# EAGLE board SparkFun_Thing_Plus_RA6M5-Panel (EAGLE 9.6.2), part 1 of 6
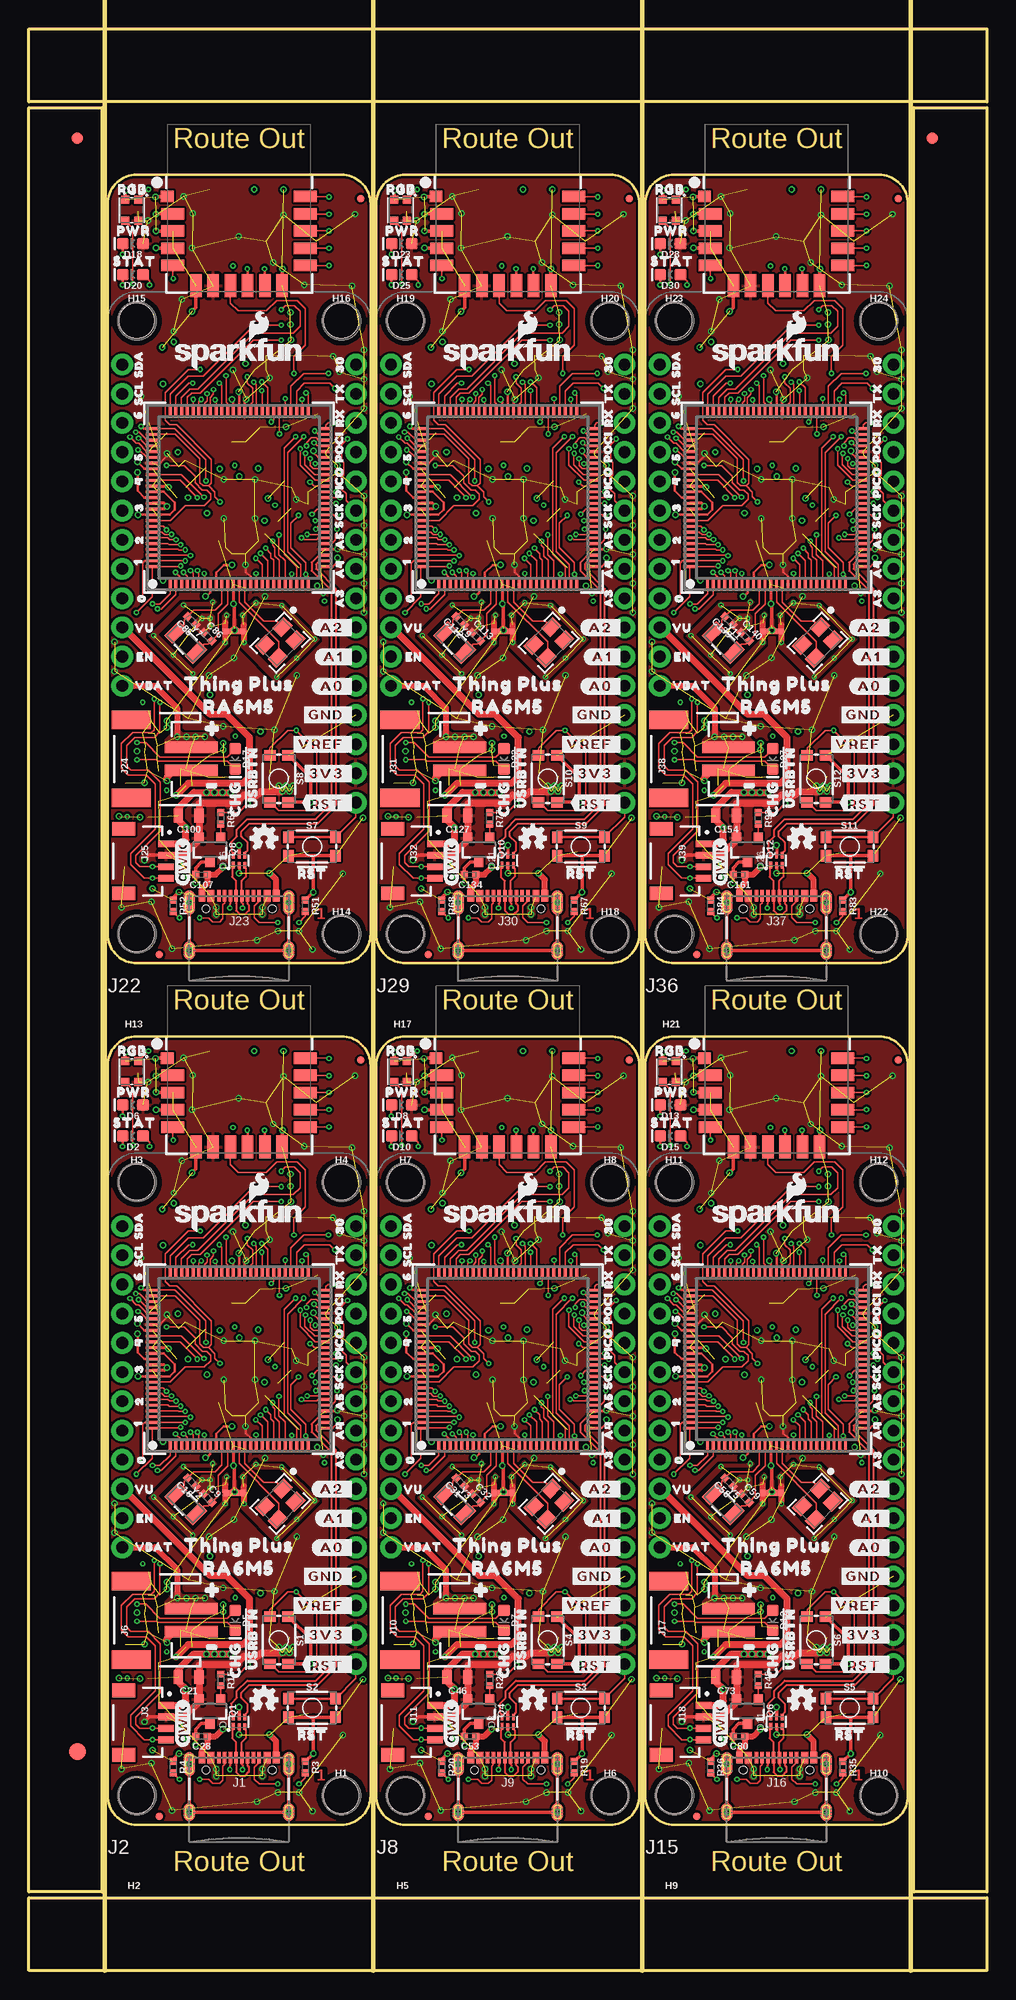
[diagram p0: board, top side]
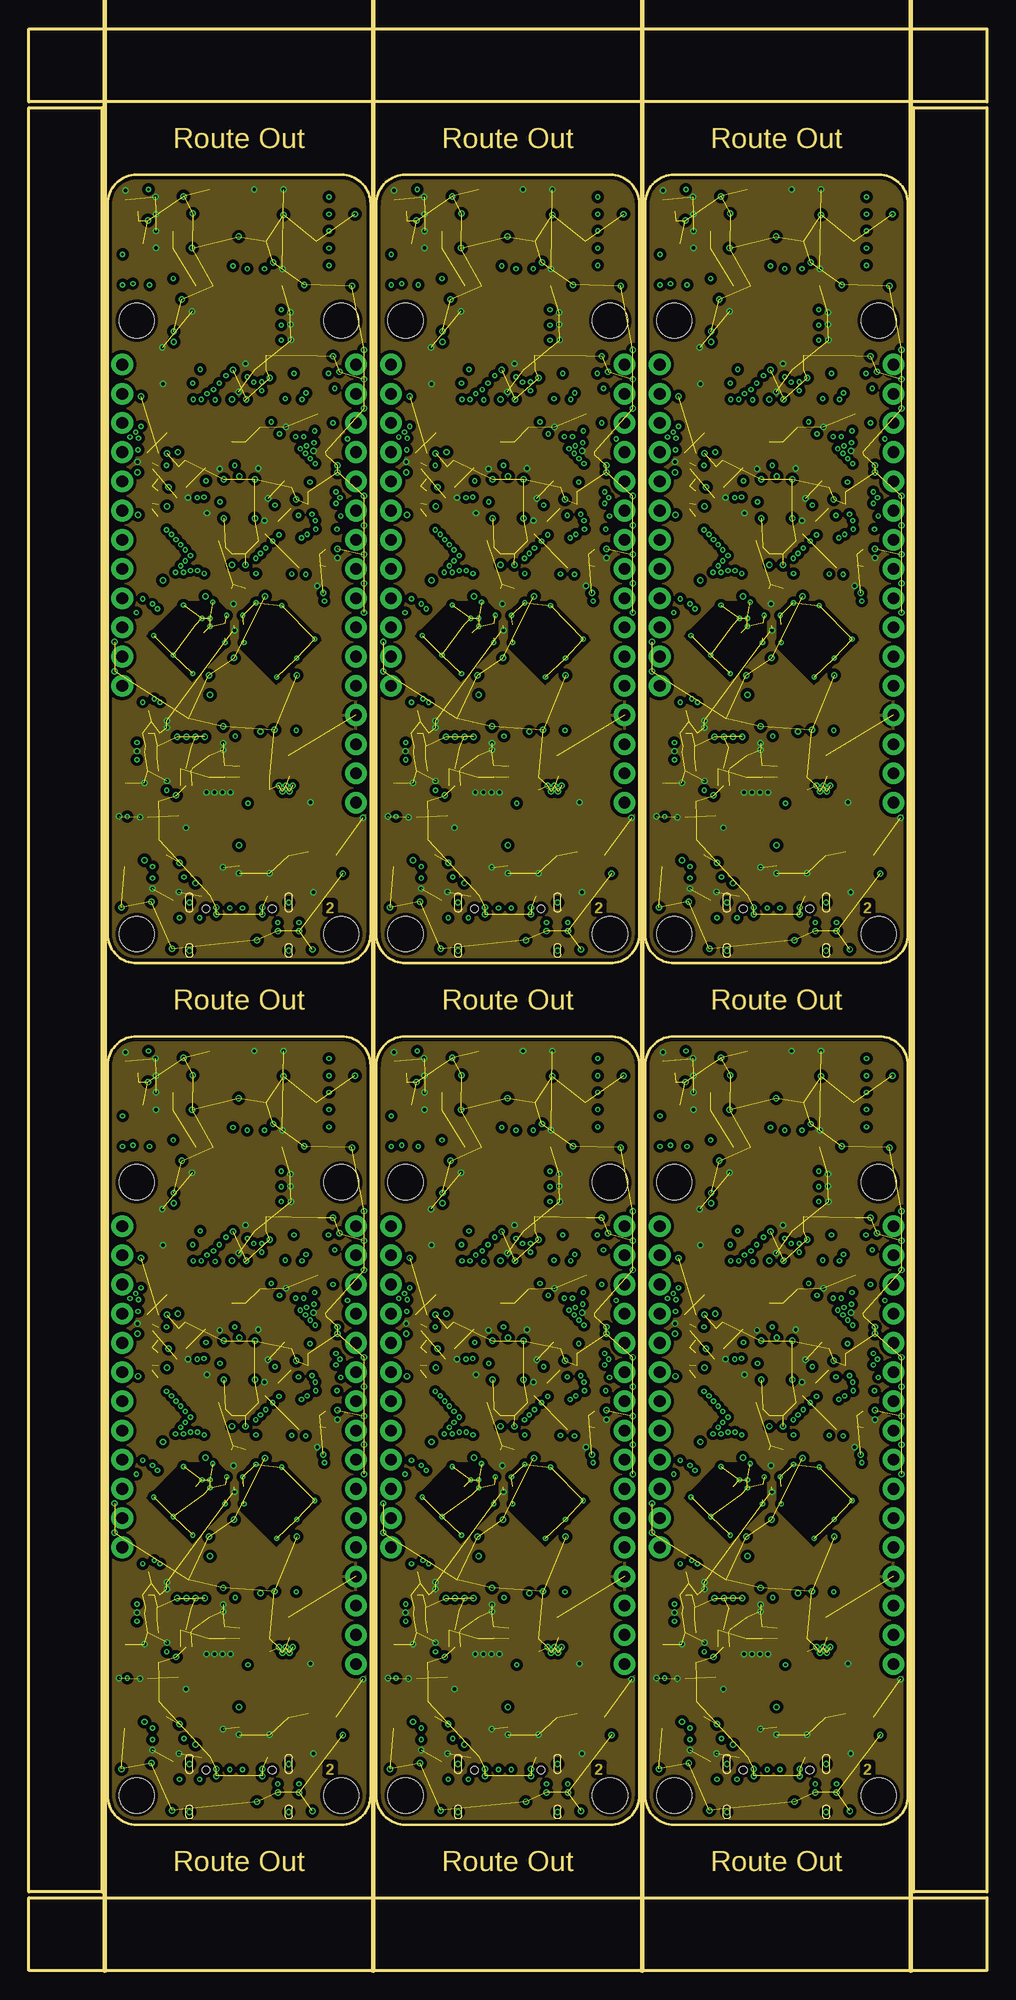
[diagram p1: board, inner layer Route2]
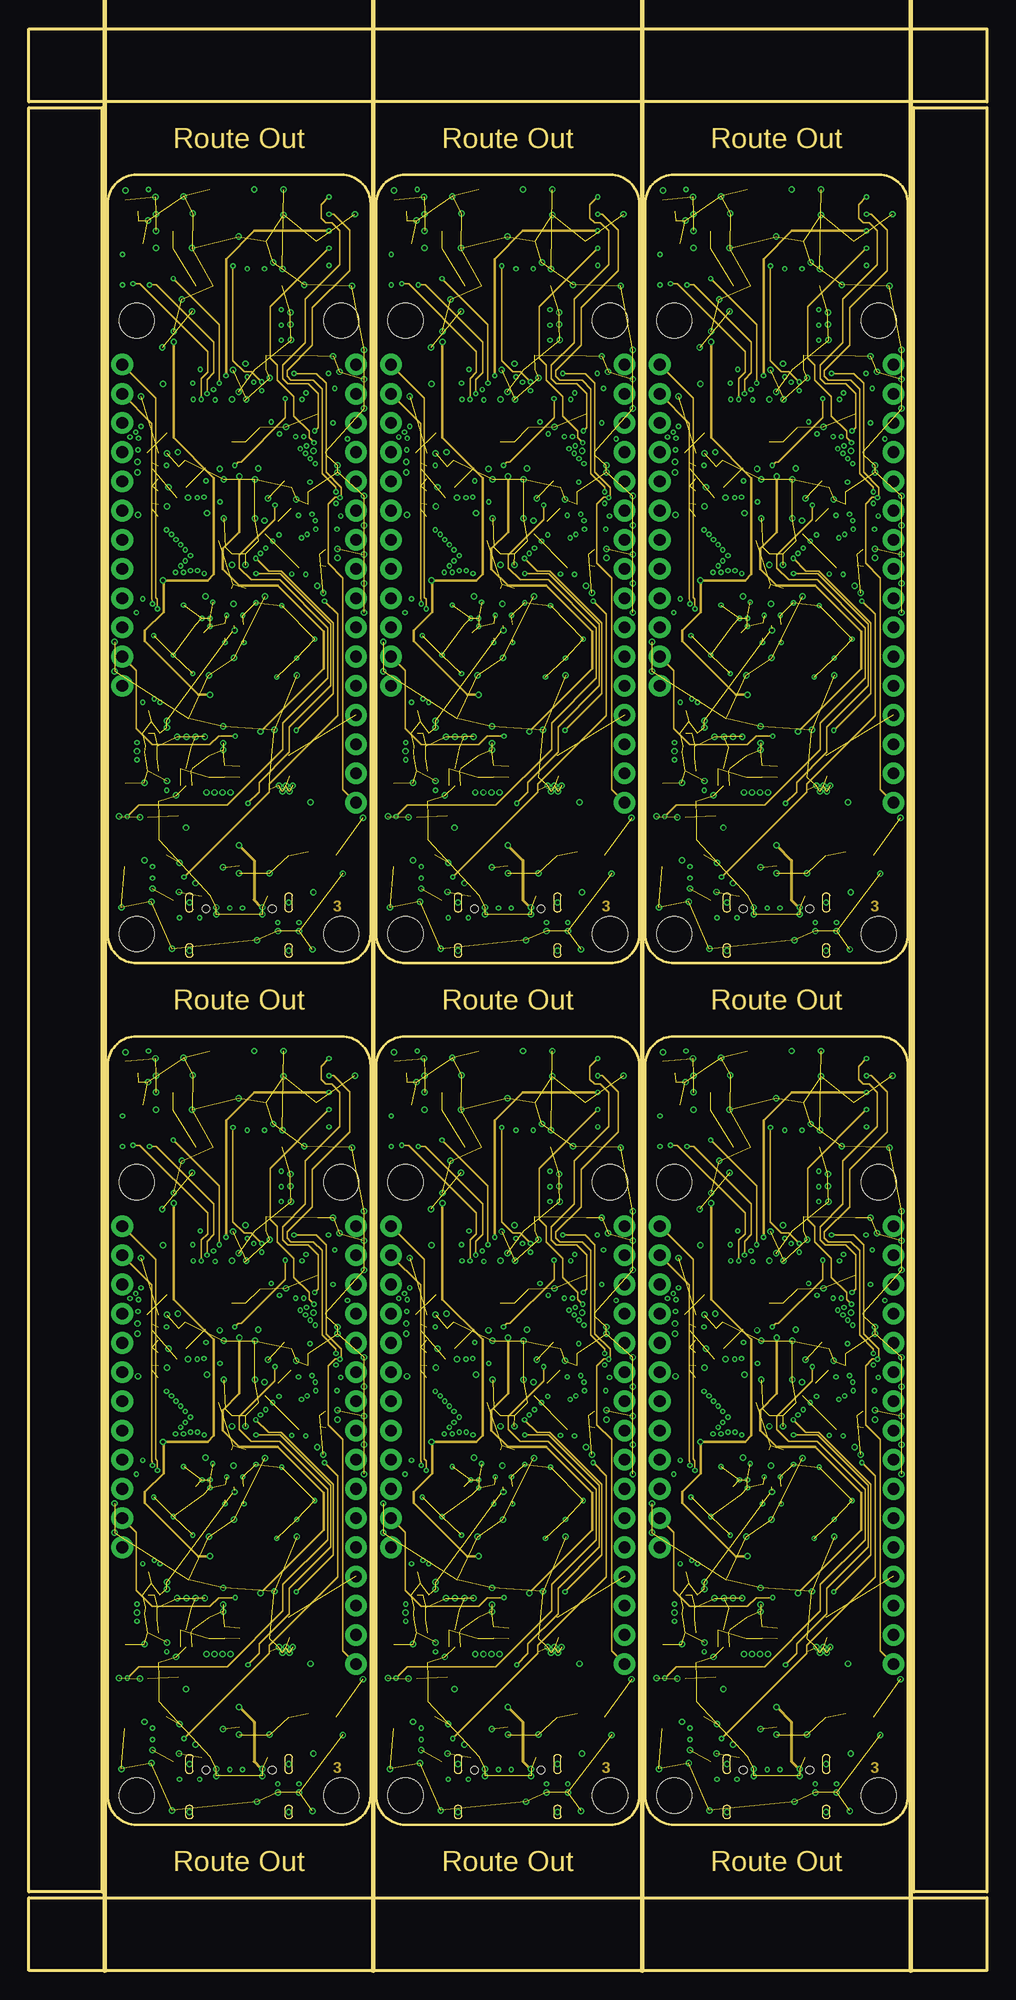
[diagram p2: board, inner layer Route3]
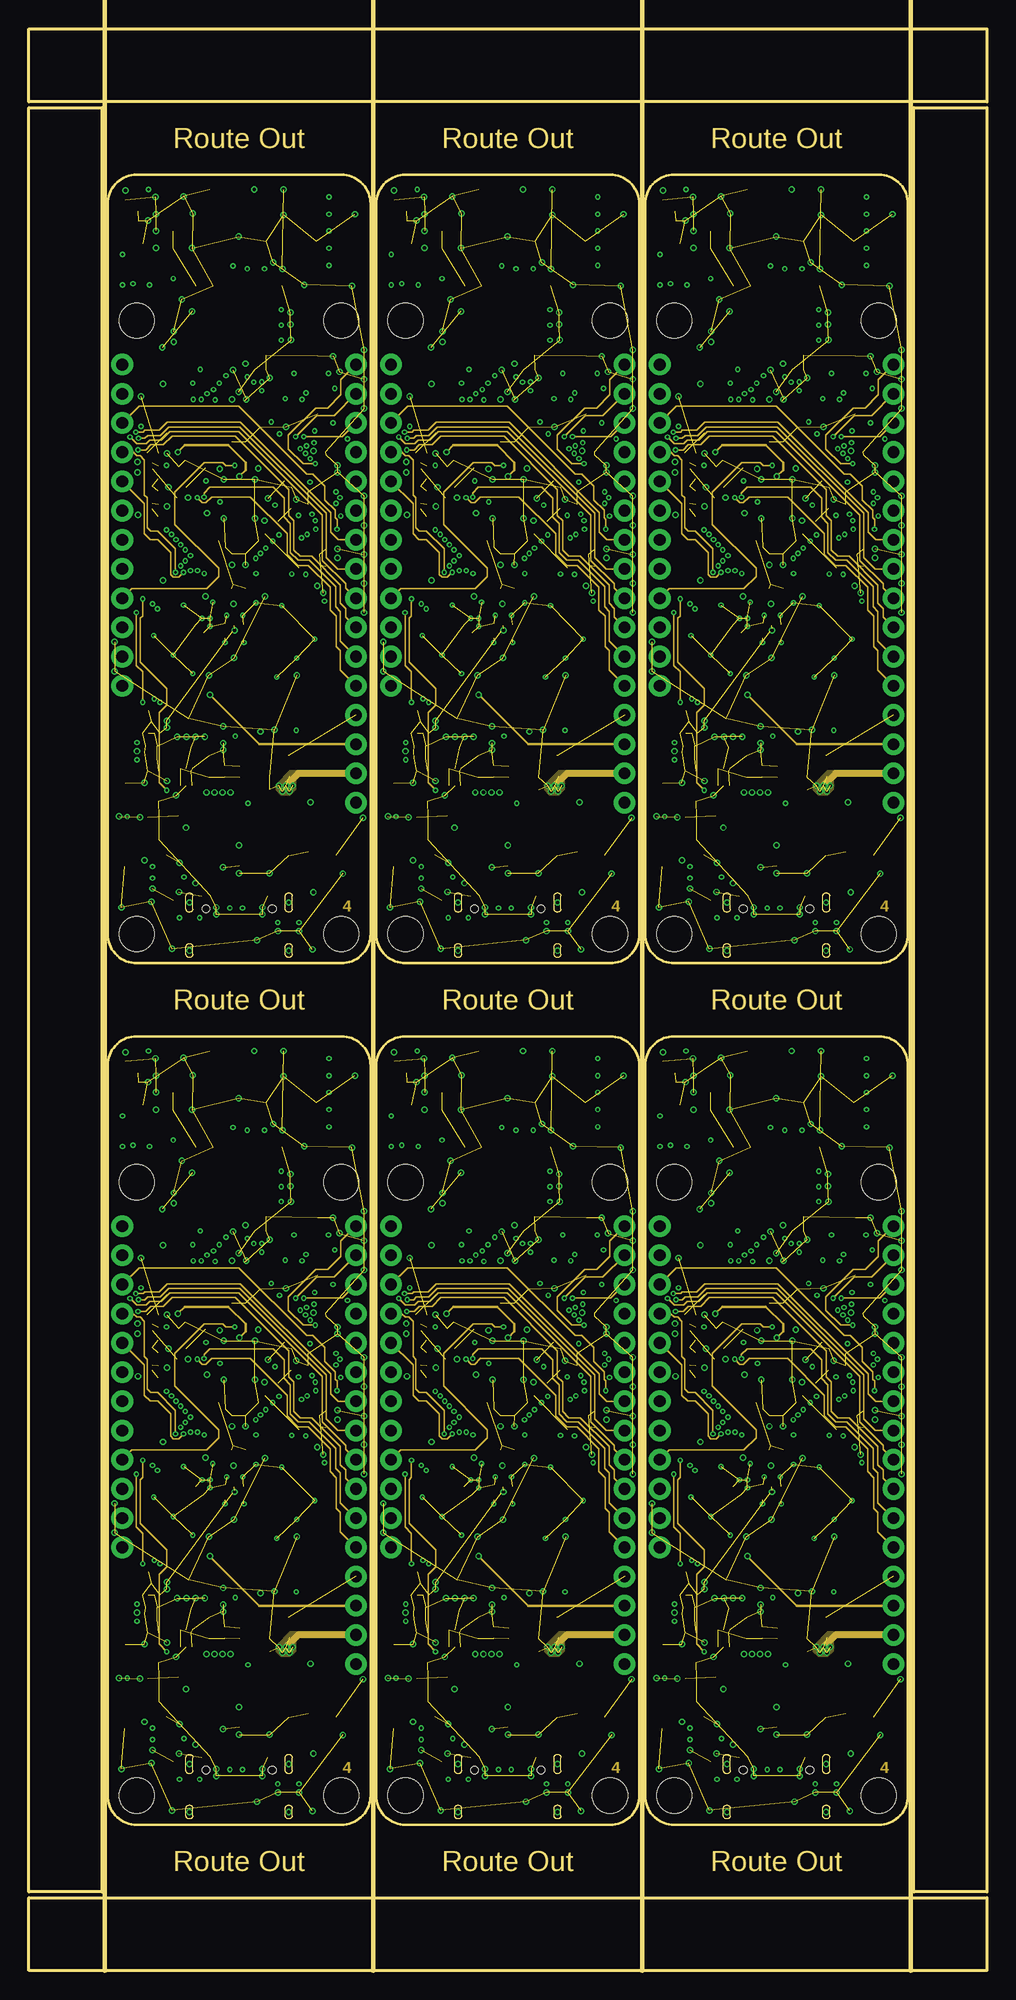
[diagram p3: board, inner layer Route14]
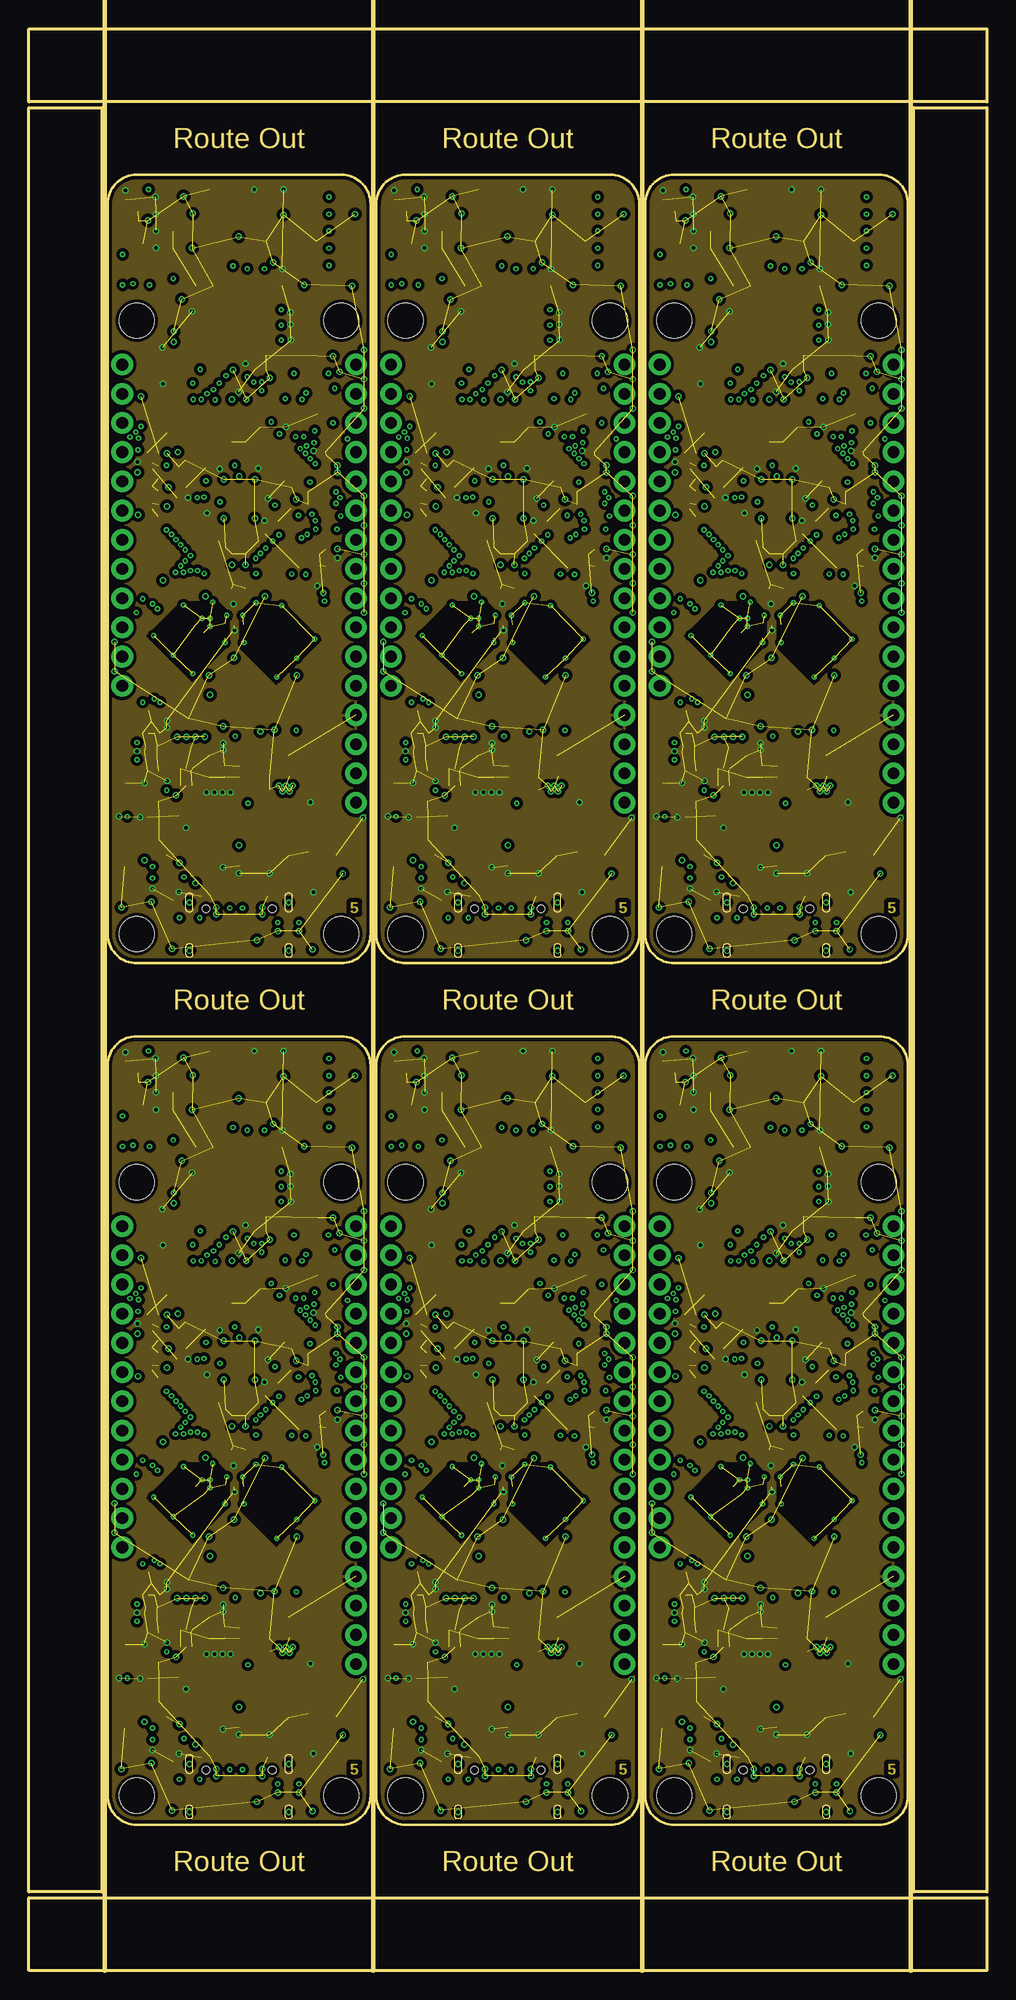
[diagram p4: board, inner layer Route15]
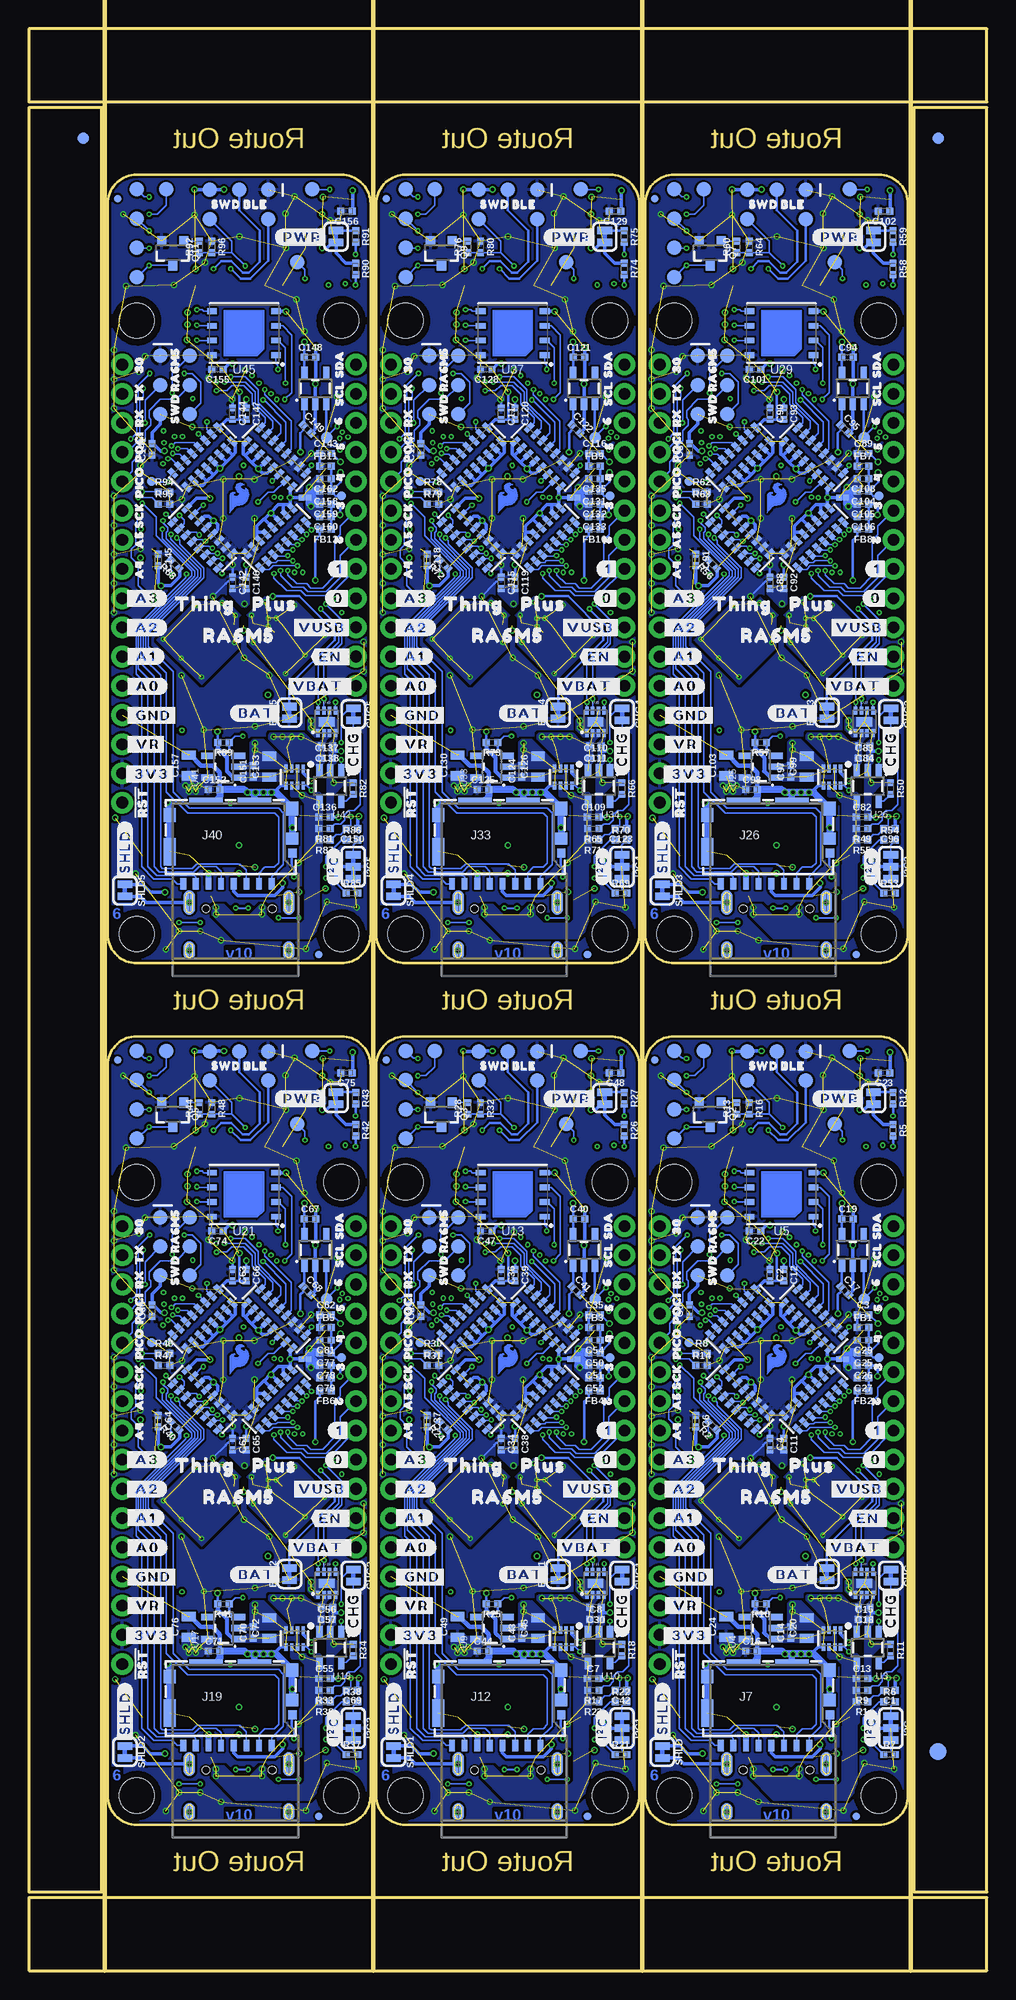
[diagram p5: board, bottom side, seen from below]

Size 83.31 x 168.91 mm. Coordinates in mm from the lower left corner, seen from the top.
Outline: 6.86,78.74 arc-90 9.4,81.28 27.18,81.28 arc-90 29.72,78.74 29.72,15.24 arc-90 27.18,12.7 9.4,12.7 arc-90 6.86,15.24 6.86,78.74
Outline: 30.23,78.74 arc-90 32.77,81.28 50.55,81.28 arc-90 53.09,78.74 53.09,15.24 arc-90 50.55,12.7 32.77,12.7 arc-90 30.23,15.24 30.23,78.74
Outline: 53.59,78.74 arc-90 56.13,81.28 73.91,81.28 arc-90 76.45,78.74 76.45,15.24 arc-90 73.91,12.7 56.13,12.7 arc-90 53.59,15.24 53.59,78.74
Outline: 6.86,153.67 arc-90 9.4,156.21 27.18,156.21 arc-90 29.72,153.67 29.72,90.17 arc-90 27.18,87.63 9.4,87.63 arc-90 6.86,90.17 6.86,153.67
Outline: 30.23,153.67 arc-90 32.77,156.21 50.55,156.21 arc-90 53.09,153.67 53.09,90.17 arc-90 50.55,87.63 32.77,87.63 arc-90 30.23,90.17 30.23,153.67
Outline: 53.59,153.67 arc-90 56.13,156.21 73.91,156.21 arc-90 76.45,153.67 76.45,90.17 arc-90 73.91,87.63 56.13,87.63 arc-90 53.59,90.17 53.59,153.67
Outline: 0,6.35 83.31,6.35 83.31,0 0,0 0,6.35
Outline: 76.96,162.05 83.31,162.05 83.31,6.86 76.96,6.86 76.96,162.05
Outline: 0,168.91 83.31,168.91 83.31,162.56 0,162.56 0,168.91
Outline: 0,162.05 6.35,162.05 6.35,6.86 0,6.86 0,162.05
Copper layers (1+2*3+14*15+16): Top 0.035mm / dielectric 0.0994mm / Route2 0.0152mm / dielectric 0.55mm / Route3 0.0152mm / dielectric 0.1088mm / Route14 0.0152mm / dielectric 0.55mm / Route15 0.0152mm / dielectric 0.0994mm / Bottom 0.035mm
Design rules "SparkFun_Thing_Plus_RA6M5": minimum track width 0.09mm, minimum drill 0.2mm, track to track 0.09mm, track to pad 5mil, pad to pad 5mil, via to via 5mil, smd to smd 5mil, copper to edge 7mil, drill to drill 7mil, minimum pad ring 5mil, minimum via ring 5mil, stop-mask expansion 2.5mil, vias tented up to drill 25mil, thermal gap 10mil
Net classes: 2 CLK signals: width 0.15 mm, drill 0.2 mm, clearance 0.15 mm to class 0, clearance 0.15 mm to class 1, clearance 0.15 mm; 3 Analog Ground: width 0.2 mm, clearance 0.2 mm to class 1, clearance 0.3 mm to class 2; 4 Power: width 0.2 mm, drill 0.3 mm, clearance 0.2 mm to class 0, clearance 0.1 mm to class 1, clearance 0.15 mm to class 2, clearance 0.2 mm to class 3, clearance 0.2 mm; 5 USB diff: width 0.16 mm, drill 0.2 mm, clearance 0.3 mm to class 0, clearance 0.3 mm to class 1, clearance 0.3 mm to class 2, clearance 0.3 mm to class 3, clearance 0.2 mm to class 4, clearance 0.22 mm
Milling: 5 lines

## Footprints (pad centres in the part's own frame; a part is rotated, then mirrored left to right if it is on the bottom)
SMT-JUMPER_2_NC_TRACE_SILK = smd 0.66 x 1.27: 1 -0.521,0; 2 0.521,0
0402-TIGHT = smd 0.6 x 0.6: 1 -0.5,0; 2 0.5,0
0805 = smd 0.8 x 1.2: 1 -0.9,0; 2 0.9,0
SOT886 = smd 0.61 x 0.25: 1 -0.405,0.5 | smd 0.56 x 0.25: 2 -0.43,0; 3 -0.43,-0.5; 4 0.43,-0.5; 5 0.43,0; 6 0.43,0.5
LED-0603 = smd 1 x 1: A -0.877,0; C 0.877,0
WS2812-2020 = smd 0.7 x 0.7: DI -0.915,0.55; DO 0.915,-0.55; GND 0.915,0.55; VCC -0.915,-0.55
FIDUCIAL-1X2 = smd 1 x 1: 1 0,0
FIDUCIAL-1.5X3 = smd 1.5 x 1.5: 1 0,0
FIDUCIAL-MICRO = smd 0.635 x 0.635: 1 0,0
STAND-OFF-TIGHT = hole 3.048: 0,0
SMT-JUMPER_3_2-NC_TRACE_SILK = smd 0.66 x 1.27: 1 -1.041,0; 2 0,0; 3 1.041,0
USB-C-16P-6LAYER-ISOLATED = smd 0.3 x 1: A5 -1.25,-0.34; A6 -0.25,-0.34; A7 0.25,-0.34; A8 1.25,-0.34; B5 1.75,-0.34; B6 0.75,-0.34; B7 -0.75,-0.34; B8 -1.75,-0.34 | smd 0.6 x 1: GND -3.225,-0.34; GND2 3.225,-0.34; VBUS1 -2.45,-0.34; VBUS2 2.45,-0.34 | smd 1 x 2.1: SHLD1 -4.32,-0.915; SHLD2 4.32,-0.915 | smd 1 x 2.1 bottom: SHLD3 -4.32,-0.915; SHLD4 4.32,-0.915 | smd 1 x 1.6: SHLD5 -4.32,-5.095; SHLD8 4.32,-5.095 | smd 1 x 1.6 bottom: SHLD6 -4.32,-5.095; SHLD7 4.32,-5.095 | hole 0.65: -2.89,-1.445; 2.89,-1.445
THING_PLUS = drill 1.016 pad 1.88: 1 1.27,52.07; 2 1.27,49.53; 3 1.27,46.99; 4 1.27,44.45; 5 1.27,41.91; 6 1.27,39.37; 7 1.27,36.83; 8 1.27,34.29; 9 1.27,31.75; 10 1.27,29.21; 11 1.27,26.67; 12 1.27,24.13; 13 21.59,52.07; 14 21.59,49.53; 15 21.59,46.99; 16 21.59,44.45; 17 21.59,41.91; 18 21.59,39.37; 19 21.59,36.83; 20 21.59,34.29; 21 21.59,31.75; 22 21.59,29.21; 23 21.59,26.67; 24 21.59,24.13; 25 21.59,21.59; 26 21.59,19.05; 27 21.59,16.51; 28 21.59,13.97
JST04_1MM_RA = smd 0.6 x 1.35: 1 -1.5,0; 2 -0.5,0; 3 0.5,0; 4 1.5,0 | smd 1.2 x 2: NC1 2.8,-3.675; NC2 -2.8,-3.675
PAD_05_03X2_TP = smd 1.27 x 1.27: 1 -2.54,-1.27; 2 -2.54,1.27; 3 0,-1.27; 4 0,1.27; 5 2.54,-1.27; 6 2.54,1.27
PAD_05_03X2_TP_NO4 = smd 1.27 x 1.27: 1 -2.54,-1.27; 2 -2.54,1.27; 3 0,-1.27; 5 2.54,-1.27; 6 2.54,1.27
JST-2-SMD = smd 1 x 4.6: 1 -1,-3.7; 2 1,-3.7 | smd 1.6 x 3.4: NC1 -3.4,1.5; NC2 3.4,1.5
MICROSD_TINY = smd 0.5 x 1: 1 3.55,-3.85; 2 2.45,-3.85; 3 1.35,-3.85; 4 0.25,-3.85; 5 -0.85,-3.85; 6 -1.95,-3.85; 7 -3.05,-3.85; 8 -4.15,-3.85 | smd 0.72 x 0.78: 9 5.35,-1.17 | smd 1.05 x 1.08: GND1 5.35,0.1 | smd 1.05 x 1.2: GND2 5.35,2.71; GND3 -5.325,2.14 | smd 1.05 x 2.39: GND4 -5.325,-1.045 | smd 2.91 x 0.55: GND5 -2.145,3.385; GND6 2.045,3.385
SOT23-3 = smd 0.8 x 0.9: 1 -0.95,-1; 2 0.95,-1; 3 0,1.1
2506_AR = smd 0.45 x 0.9: 1 -2.8,-0.85; 2 -2,-0.85; 3 -1.2,-0.85; 4 -0.4,-0.85; 5 0.4,-0.85; 6 1.2,-0.85; 7 2,-0.85; 8 2.8,-0.85; 9 2.8,0.85; 10 2,0.85; 11 1.2,0.85; 12 0.4,0.85; 13 -0.4,0.85; 14 -1.2,0.85; 15 -2,0.85; 16 -2.8,0.85
TACTILE_SWITCH_SMD_4.6X2.8MM = smd 0.9 x 1: 1 -2.05,-0.8; 2 2.05,-0.8; 3 2.05,0.8; 4 -2.05,0.8
2PT_GND_TIE_SMALL = smd 0.5 x 0.5: P$1 0,0.3; P$2 0,-0.3
PAD.03X.05 = smd 1.27 x 1.27: 1 0,0
PAD.03X.04 = smd 1.016 x 1.016: 1 0,0
PAD.03X.03 = smd 0.762 x 0.762: 1 0,0
P-LQFP100-14X14-0.50 = smd 0.25 x 1.1: 1 -6,-7.55; 2 -5.5,-7.55; 3 -5,-7.55; 4 -4.5,-7.55; 5 -4,-7.55; 6 -3.5,-7.55; 7 -3,-7.55; 8 -2.5,-7.55; 9 -2,-7.55; 10 -1.5,-7.55; 11 -1,-7.55; 12 -0.5,-7.55; 13 0,-7.55; 14 0.5,-7.55; 15 1,-7.55; 16 1.5,-7.55; 17 2,-7.55; 18 2.5,-7.55; 19 3,-7.55; 20 3.5,-7.55; 21 4,-7.55; 22 4.5,-7.55; 23 5,-7.55; 24 5.5,-7.55; 25 6,-7.55; 51 6,7.55; 52 5.5,7.55; 53 5,7.55; 54 4.5,7.55; 55 4,7.55; 56 3.5,7.55; 57 3,7.55; 58 2.5,7.55; 59 2,7.55; 60 1.5,7.55; 61 1,7.55; 62 0.5,7.55; 63 0,7.55; 64 -0.5,7.55; 65 -1,7.55; 66 -1.5,7.55; 67 -2,7.55; 68 -2.5,7.55; 69 -3,7.55; 70 -3.5,7.55; 71 -4,7.55; 72 -4.5,7.55; 73 -5,7.55; 74 -5.5,7.55; 75 -6,7.55 | smd 1.1 x 0.25: 26 7.55,-6; 27 7.55,-5.5; 28 7.55,-5; 29 7.55,-4.5; 30 7.55,-4; 31 7.55,-3.5; 32 7.55,-3; 33 7.55,-2.5; 34 7.55,-2; 35 7.55,-1.5; 36 7.55,-1; 37 7.55,-0.5; 38 7.55,0; 39 7.55,0.5; 40 7.55,1; 41 7.55,1.5; 42 7.55,2; 43 7.55,2.5; 44 7.55,3; 45 7.55,3.5; 46 7.55,4; 47 7.55,4.5; 48 7.55,5; 49 7.55,5.5; 50 7.55,6; 76 -7.55,6; 77 -7.55,5.5; 78 -7.55,5; 79 -7.55,4.5; 80 -7.55,4; 81 -7.55,3.5; 82 -7.55,3; 83 -7.55,2.5; 84 -7.55,2; 85 -7.55,1.5; 86 -7.55,1; 87 -7.55,0.5; 88 -7.55,0; 89 -7.55,-0.5; 90 -7.55,-1; 91 -7.55,-1.5; 92 -7.55,-2; 93 -7.55,-2.5; 94 -7.55,-3; 95 -7.55,-3.5; 96 -7.55,-4; 97 -7.55,-4.5; 98 -7.55,-5; 99 -7.55,-5.5; 100 -7.55,-6
DA14531MOD = smd 1.1 x 1: 1 -6.25,1 | smd 2 x 1: 2 -5.75,-0.5; 3 -5.75,-2; 4 -5.75,-3.5; 5 -5.75,-5; 12 5.75,-5; 13 5.75,-3.5; 14 5.75,-2; 15 5.75,-0.5; 16 5.75,1 | smd 1 x 2: 6 -3.75,-6.75; 7 -2.25,-6.75; 8 -0.75,-6.75; 9 0.75,-6.75; 10 2.25,-6.75; 11 3.75,-6.75
SOT23-5 = smd 0.55 x 1.2: 1 -0.95,-1.3; 2 0,-1.3; 3 0.95,-1.3; 4 0.95,1.3; 5 -0.95,1.3
WSON-8-6X5 = smd 0.85 x 0.5: 1 -2.775,1.905; 2 -2.775,0.635; 3 -2.775,-0.635; 4 -2.775,-1.905; 5 2.775,-1.905; 6 2.775,-0.635; 7 2.775,0.635; 8 2.775,1.905
DFN-8 = smd 0.3 x 0.7: 1 -0.75,-0.99; 2 -0.25,-0.99; 3 0.25,-0.99; 4 0.75,-0.99; 5 0.75,0.99; 6 0.25,0.99; 7 -0.25,0.99; 8 -0.75,0.99 | smd 1.38 x 0.8: 9 0,0
SOT8 = smd 0.67 x 0.3: 1 -0.74,0.75; 2 -0.74,0.25; 3 -0.74,-0.25; 4 -0.74,-0.75; 5 0.74,-0.75; 6 0.74,-0.25; 7 0.74,0.25; 8 0.74,0.75
4-SMD,32X25 = smd 1.4 x 1.1: 1 -1.1,-0.8; 2 1.1,-0.8; 3 1.1,0.8; 4 -1.1,0.8
CRYSTAL-SMD-3.2X1.5MM = smd 1 x 1.8: P$1 -1.25,0; P$2 1.25,0

## Placement (x,y rotation side)
BAT  JUMPER-SMT_2_NC_TRACE_SILK  [SMT-JUMPER_2_NC_TRACE_SILK]  13.91,34.5 90 bottom
BAT1  JUMPER-SMT_2_NC_TRACE_SILK  [SMT-JUMPER_2_NC_TRACE_SILK]  37.28,34.5 90 bottom
BAT2  JUMPER-SMT_2_NC_TRACE_SILK  [SMT-JUMPER_2_NC_TRACE_SILK]  60.64,34.5 90 bottom
BAT3  JUMPER-SMT_2_NC_TRACE_SILK  [SMT-JUMPER_2_NC_TRACE_SILK]  13.91,109.43 90 bottom
BAT4  JUMPER-SMT_2_NC_TRACE_SILK  [SMT-JUMPER_2_NC_TRACE_SILK]  37.28,109.43 90 bottom
BAT5  JUMPER-SMT_2_NC_TRACE_SILK  [SMT-JUMPER_2_NC_TRACE_SILK]  60.64,109.43 90 bottom
C1  1.0uF  [0402-TIGHT]  8.46,24.4 180 bottom
C2  0.1uF  [0402-TIGHT]  18.86,60.5 270 bottom
C3  0.1uF  [0402-TIGHT]  10.76,57.05 0 bottom
C4  0.1uF  [0402-TIGHT]  18.86,45.8 270 bottom
C5  0.1uF  [0402-TIGHT]  25.86,57.4 90 bottom
C6  0.1uF  [0402-TIGHT]  25.31,47.8 270 bottom
C7  2.2uF  [0402-TIGHT]  34.23,25.41 0 bottom
C8  2.2uF  [0402-TIGHT]  34.03,30.56 0 bottom
C9  9.1pF  [0402-TIGHT]  15.56,41.1 315 top
C10  9.1pF  [0402-TIGHT]  14.16,42.5 135 top
C11  0.1uF  [0402-TIGHT]  17.66,45.8 270 bottom
C12  0.1uF  [0402-TIGHT]  17.66,60.5 270 bottom
C13  2.2uF  [0402-TIGHT]  10.86,25.41 0 bottom
C14  2.2uF  [0402-TIGHT]  17.06,29.4 90 bottom
C15  2.2uF  [0402-TIGHT]  10.67,30.56 0 bottom
C16  2.2uF  [0402-TIGHT]  20.46,27.8 0 bottom
C17  2.2uF  [0402-TIGHT]  12.36,59.15 315 bottom
C18  0.1uF  [0402-TIGHT]  10.66,31.6 180 bottom
C19  1.0uF  [0402-TIGHT]  12.11,65.4 0 bottom
C20  10uF  [0805]  15.66,29.8 90 bottom
C21  10uF  [0805]  13.91,25.55 180 top
C22  0.1uF  [0402-TIGHT]  20.16,64.35 180 bottom
C23  0.1uF  [0402-TIGHT]  8.96,78.1 180 bottom
C24  47uF/6.3V  [0805]  22.66,29.9 90 bottom
C25  0.1uF  [0402-TIGHT]  10.76,53.75 180 bottom
C26  0.1uF  [0402-TIGHT]  10.76,52.65 180 bottom
C27  1.0uF  [0402-TIGHT]  10.76,51.55 180 bottom
C28  0.1uF  [0402-TIGHT]  15.01,20.4 180 top
C29  1.0uF  [0402-TIGHT]  10.76,54.85 180 bottom
C30  0.1uF  [0402-TIGHT]  34.03,31.6 180 bottom
C31  9.1pF  [0402-TIGHT]  37.53,42.5 135 top
C32  9.1pF  [0402-TIGHT]  38.93,41.1 315 top
C33  0.1uF  [0402-TIGHT]  49.23,57.4 90 bottom
C34  0.1uF  [0402-TIGHT]  42.23,45.8 270 bottom
C35  0.1uF  [0402-TIGHT]  34.13,57.05 0 bottom
C36  0.1uF  [0402-TIGHT]  42.23,60.5 270 bottom
C37  0.1uF  [0402-TIGHT]  48.68,47.8 270 bottom
C38  0.1uF  [0402-TIGHT]  41.03,45.8 270 bottom
C39  0.1uF  [0402-TIGHT]  41.03,60.5 270 bottom
C40  1.0uF  [0402-TIGHT]  35.48,65.4 0 bottom
C41  2.2uF  [0402-TIGHT]  35.73,59.15 315 bottom
C42  1.0uF  [0402-TIGHT]  31.83,24.4 180 bottom
C43  2.2uF  [0402-TIGHT]  40.43,29.4 90 bottom
C44  2.2uF  [0402-TIGHT]  43.83,27.8 0 bottom
C45  10uF  [0805]  39.03,29.8 90 bottom
C46  10uF  [0805]  37.28,25.55 180 top
C47  0.1uF  [0402-TIGHT]  43.53,64.35 180 bottom
C48  0.1uF  [0402-TIGHT]  32.33,78.1 180 bottom
C49  47uF/6.3V  [0805]  46.03,29.9 90 bottom
C50  0.1uF  [0402-TIGHT]  34.13,53.75 180 bottom
C51  0.1uF  [0402-TIGHT]  34.13,52.65 180 bottom
C52  1.0uF  [0402-TIGHT]  34.13,51.55 180 bottom
C53  0.1uF  [0402-TIGHT]  38.38,20.4 180 top
C54  1.0uF  [0402-TIGHT]  34.13,54.85 180 bottom
C55  2.2uF  [0402-TIGHT]  57.6,25.41 0 bottom
C56  2.2uF  [0402-TIGHT]  57.4,30.56 0 bottom
C57  0.1uF  [0402-TIGHT]  57.39,31.6 180 bottom
C58  9.1pF  [0402-TIGHT]  60.89,42.5 135 top
C59  9.1pF  [0402-TIGHT]  62.29,41.1 315 top
C60  0.1uF  [0402-TIGHT]  72.59,57.4 90 bottom
C61  0.1uF  [0402-TIGHT]  65.59,45.8 270 bottom
C62  0.1uF  [0402-TIGHT]  57.49,57.05 0 bottom
C63  0.1uF  [0402-TIGHT]  65.59,60.5 270 bottom
C64  0.1uF  [0402-TIGHT]  72.04,47.8 270 bottom
C65  0.1uF  [0402-TIGHT]  64.39,45.8 270 bottom
C66  0.1uF  [0402-TIGHT]  64.39,60.5 270 bottom
C67  1.0uF  [0402-TIGHT]  58.84,65.4 0 bottom
C68  2.2uF  [0402-TIGHT]  59.09,59.15 315 bottom
C69  1.0uF  [0402-TIGHT]  55.19,24.4 180 bottom
C70  2.2uF  [0402-TIGHT]  63.79,29.4 90 bottom
C71  2.2uF  [0402-TIGHT]  67.19,27.8 0 bottom
C72  10uF  [0805]  62.39,29.8 90 bottom
C73  10uF  [0805]  60.64,25.55 180 top
C74  0.1uF  [0402-TIGHT]  66.89,64.35 180 bottom
C75  0.1uF  [0402-TIGHT]  55.69,78.1 180 bottom
C76  47uF/6.3V  [0805]  69.39,29.9 90 bottom
C77  0.1uF  [0402-TIGHT]  57.49,53.75 180 bottom
C78  0.1uF  [0402-TIGHT]  57.49,52.65 180 bottom
C79  1.0uF  [0402-TIGHT]  57.49,51.55 180 bottom
C80  0.1uF  [0402-TIGHT]  61.74,20.4 180 top
C81  1.0uF  [0402-TIGHT]  57.49,54.85 180 bottom
C82  2.2uF  [0402-TIGHT]  10.86,100.34 0 bottom
C83  2.2uF  [0402-TIGHT]  10.67,105.49 0 bottom
C84  0.1uF  [0402-TIGHT]  10.66,106.53 180 bottom
C85  9.1pF  [0402-TIGHT]  14.16,117.43 135 top
C86  9.1pF  [0402-TIGHT]  15.56,116.03 315 top
C87  0.1uF  [0402-TIGHT]  25.86,132.33 90 bottom
C88  0.1uF  [0402-TIGHT]  18.86,120.73 270 bottom
C89  0.1uF  [0402-TIGHT]  10.76,131.98 0 bottom
C90  0.1uF  [0402-TIGHT]  18.86,135.43 270 bottom
C91  0.1uF  [0402-TIGHT]  25.31,122.73 270 bottom
C92  0.1uF  [0402-TIGHT]  17.66,120.73 270 bottom
C93  0.1uF  [0402-TIGHT]  17.66,135.43 270 bottom
C94  1.0uF  [0402-TIGHT]  12.11,140.33 0 bottom
C95  2.2uF  [0402-TIGHT]  12.36,134.08 315 bottom
C96  1.0uF  [0402-TIGHT]  8.46,99.33 180 bottom
C97  2.2uF  [0402-TIGHT]  17.06,104.33 90 bottom
C98  2.2uF  [0402-TIGHT]  20.46,102.73 0 bottom
C99  10uF  [0805]  15.66,104.73 90 bottom
C100  10uF  [0805]  13.91,100.48 180 top
C101  0.1uF  [0402-TIGHT]  20.16,139.28 180 bottom
C102  0.1uF  [0402-TIGHT]  8.96,153.03 180 bottom
C103  47uF/6.3V  [0805]  22.66,104.83 90 bottom
C104  0.1uF  [0402-TIGHT]  10.76,128.68 180 bottom
C105  0.1uF  [0402-TIGHT]  10.76,127.58 180 bottom
C106  1.0uF  [0402-TIGHT]  10.76,126.48 180 bottom
C107  0.1uF  [0402-TIGHT]  15.01,95.33 180 top
C108  1.0uF  [0402-TIGHT]  10.76,129.78 180 bottom
C109  2.2uF  [0402-TIGHT]  34.23,100.34 0 bottom
C110  2.2uF  [0402-TIGHT]  34.03,105.49 0 bottom
C111  0.1uF  [0402-TIGHT]  34.03,106.53 180 bottom
C112  9.1pF  [0402-TIGHT]  37.53,117.43 135 top
C113  9.1pF  [0402-TIGHT]  38.93,116.03 315 top
C114  0.1uF  [0402-TIGHT]  49.23,132.33 90 bottom
C115  0.1uF  [0402-TIGHT]  42.23,120.73 270 bottom
C116  0.1uF  [0402-TIGHT]  34.13,131.98 0 bottom
C117  0.1uF  [0402-TIGHT]  42.23,135.43 270 bottom
C118  0.1uF  [0402-TIGHT]  48.68,122.73 270 bottom
C119  0.1uF  [0402-TIGHT]  41.03,120.73 270 bottom
C120  0.1uF  [0402-TIGHT]  41.03,135.43 270 bottom
C121  1.0uF  [0402-TIGHT]  35.48,140.33 0 bottom
C122  2.2uF  [0402-TIGHT]  35.73,134.08 315 bottom
C123  1.0uF  [0402-TIGHT]  31.83,99.33 180 bottom
C124  2.2uF  [0402-TIGHT]  40.43,104.33 90 bottom
C125  2.2uF  [0402-TIGHT]  43.83,102.73 0 bottom
C126  10uF  [0805]  39.03,104.73 90 bottom
C127  10uF  [0805]  37.28,100.48 180 top
C128  0.1uF  [0402-TIGHT]  43.53,139.28 180 bottom
C129  0.1uF  [0402-TIGHT]  32.33,153.03 180 bottom
C130  47uF/6.3V  [0805]  46.03,104.83 90 bottom
C131  0.1uF  [0402-TIGHT]  34.13,128.68 180 bottom
C132  0.1uF  [0402-TIGHT]  34.13,127.58 180 bottom
C133  1.0uF  [0402-TIGHT]  34.13,126.48 180 bottom
C134  0.1uF  [0402-TIGHT]  38.38,95.33 180 top
C135  1.0uF  [0402-TIGHT]  34.13,129.78 180 bottom
C136  2.2uF  [0402-TIGHT]  57.6,100.34 0 bottom
C137  2.2uF  [0402-TIGHT]  57.4,105.49 0 bottom
C138  0.1uF  [0402-TIGHT]  57.39,106.53 180 bottom
C139  9.1pF  [0402-TIGHT]  60.89,117.43 135 top
C140  9.1pF  [0402-TIGHT]  62.29,116.03 315 top
C141  0.1uF  [0402-TIGHT]  72.59,132.33 90 bottom
C142  0.1uF  [0402-TIGHT]  65.59,120.73 270 bottom
C143  0.1uF  [0402-TIGHT]  57.49,131.98 0 bottom
C144  0.1uF  [0402-TIGHT]  65.59,135.43 270 bottom
C145  0.1uF  [0402-TIGHT]  72.04,122.73 270 bottom
C146  0.1uF  [0402-TIGHT]  64.39,120.73 270 bottom
C147  0.1uF  [0402-TIGHT]  64.39,135.43 270 bottom
C148  1.0uF  [0402-TIGHT]  58.84,140.33 0 bottom
C149  2.2uF  [0402-TIGHT]  59.09,134.08 315 bottom
C150  1.0uF  [0402-TIGHT]  55.19,99.33 180 bottom
C151  2.2uF  [0402-TIGHT]  63.79,104.33 90 bottom
C152  2.2uF  [0402-TIGHT]  67.19,102.73 0 bottom
C153  10uF  [0805]  62.39,104.73 90 bottom
C154  10uF  [0805]  60.64,100.48 180 top
C155  0.1uF  [0402-TIGHT]  66.89,139.28 180 bottom
C156  0.1uF  [0402-TIGHT]  55.69,153.03 180 bottom
C157  47uF/6.3V  [0805]  69.39,104.83 90 bottom
C158  0.1uF  [0402-TIGHT]  57.49,128.68 180 bottom
C159  0.1uF  [0402-TIGHT]  57.49,127.58 180 bottom
C160  1.0uF  [0402-TIGHT]  57.49,126.48 180 bottom
C161  0.1uF  [0402-TIGHT]  61.74,95.33 180 top
C162  1.0uF  [0402-TIGHT]  57.49,129.78 180 bottom
CHG  JUMPER-SMT_2_NC_TRACE_SILK  [SMT-JUMPER_2_NC_TRACE_SILK]  8.35,34.36 270 bottom
CHG1  JUMPER-SMT_2_NC_TRACE_SILK  [SMT-JUMPER_2_NC_TRACE_SILK]  31.71,34.36 270 bottom
CHG2  JUMPER-SMT_2_NC_TRACE_SILK  [SMT-JUMPER_2_NC_TRACE_SILK]  55.08,34.36 270 bottom
CHG3  JUMPER-SMT_2_NC_TRACE_SILK  [SMT-JUMPER_2_NC_TRACE_SILK]  8.35,109.29 270 bottom
CHG4  JUMPER-SMT_2_NC_TRACE_SILK  [SMT-JUMPER_2_NC_TRACE_SILK]  31.71,109.29 270 bottom
CHG5  JUMPER-SMT_2_NC_TRACE_SILK  [SMT-JUMPER_2_NC_TRACE_SILK]  55.08,109.29 270 bottom
D1  PRTR5V0U2F  [SOT886]  18.29,21.65 90 top
D2  BLUE  [LED-0603]  9.06,72.6 180 top
D3  PRTR5V0U2F  [SOT886]  41.66,21.65 90 top
D4  WS2812_2020  [WS2812-2020]  8.96,78.2 90 top
D5  Yellow  [LED-0603]  17.96,30.48 270 top
D6  [LED-0603]  9.06,75.3 180 top
D7  Yellow  [LED-0603]  41.33,30.48 270 top
D8  [LED-0603]  32.43,75.3 180 top
D9  WS2812_2020  [WS2812-2020]  32.33,78.2 90 top
D10  BLUE  [LED-0603]  32.43,72.6 180 top
D11  PRTR5V0U2F  [SOT886]  65.02,21.65 90 top
D12  Yellow  [LED-0603]  64.69,30.48 270 top
D13  [LED-0603]  55.79,75.3 180 top
D14  WS2812_2020  [WS2812-2020]  55.69,78.2 90 top
D15  BLUE  [LED-0603]  55.79,72.6 180 top
D16  PRTR5V0U2F  [SOT886]  18.29,96.58 90 top
D17  Yellow  [LED-0603]  17.96,105.41 270 top
D18  [LED-0603]  9.06,150.23 180 top
D19  WS2812_2020  [WS2812-2020]  8.96,153.13 90 top
D20  BLUE  [LED-0603]  9.06,147.53 180 top
D21  PRTR5V0U2F  [SOT886]  41.66,96.58 90 top
D22  Yellow  [LED-0603]  41.33,105.41 270 top
D23  [LED-0603]  32.43,150.23 180 top
D24  WS2812_2020  [WS2812-2020]  32.33,153.13 90 top
D25  BLUE  [LED-0603]  32.43,147.53 180 top
D26  PRTR5V0U2F  [SOT886]  65.02,96.58 90 top
D27  Yellow  [LED-0603]  64.69,105.41 270 top
D28  [LED-0603]  55.79,150.23 180 top
D29  WS2812_2020  [WS2812-2020]  55.69,153.13 90 top
D30  BLUE  [LED-0603]  55.79,147.53 180 top
E$1  [FIDUCIAL-1X2]  4.23,159.38 0 top
E$2  [FIDUCIAL-1X2]  4.23,159.38 0 bottom
E$3  [FIDUCIAL-1X2]  78.57,159.38 0 top
E$4  [FIDUCIAL-1X2]  78.57,159.38 0 bottom
E$5  [FIDUCIAL-1.5X3]  4.23,19.05 0 top
E$6  [FIDUCIAL-1.5X3]  4.23,19.05 0 bottom
FB1  120-OHM  [0402-TIGHT]  10.76,55.95 0 bottom
FB2  120-OHM  [0402-TIGHT]  10.76,50.45 180 bottom
FB3  120-OHM  [0402-TIGHT]  34.13,55.95 0 bottom
FB4  120-OHM  [0402-TIGHT]  34.13,50.45 180 bottom
FB5  120-OHM  [0402-TIGHT]  57.49,55.95 0 bottom
FB6  120-OHM  [0402-TIGHT]  57.49,50.45 180 bottom
FB7  120-OHM  [0402-TIGHT]  10.76,130.88 0 bottom
FB8  120-OHM  [0402-TIGHT]  10.76,125.38 180 bottom
FB9  120-OHM  [0402-TIGHT]  34.13,130.88 0 bottom
FB10  120-OHM  [0402-TIGHT]  34.13,125.38 180 bottom
FB11  120-OHM  [0402-TIGHT]  57.49,130.88 0 bottom
FB12  120-OHM  [0402-TIGHT]  57.49,125.38 180 bottom
FD1  FIDUCIALUFIDUCIAL  [FIDUCIAL-MICRO]  28.86,79.2 0 top
FD2  FIDUCIALUFIDUCIAL  [FIDUCIAL-MICRO]  11.36,13.45 0 bottom
FD3  FIDUCIALUFIDUCIAL  [FIDUCIAL-MICRO]  28.86,79.2 0 bottom
FD4  FIDUCIALUFIDUCIAL  [FIDUCIAL-MICRO]  11.36,13.45 0 top
FD5  FIDUCIALUFIDUCIAL  [FIDUCIAL-MICRO]  34.73,13.45 0 top
FD6  FIDUCIALUFIDUCIAL  [FIDUCIAL-MICRO]  34.73,13.45 0 bottom
FD7  FIDUCIALUFIDUCIAL  [FIDUCIAL-MICRO]  52.23,79.2 0 top
FD8  FIDUCIALUFIDUCIAL  [FIDUCIAL-MICRO]  52.23,79.2 0 bottom
FD9  FIDUCIALUFIDUCIAL  [FIDUCIAL-MICRO]  58.09,13.45 0 top
FD10  FIDUCIALUFIDUCIAL  [FIDUCIAL-MICRO]  58.09,13.45 0 bottom
FD11  FIDUCIALUFIDUCIAL  [FIDUCIAL-MICRO]  75.59,79.2 0 top
FD12  FIDUCIALUFIDUCIAL  [FIDUCIAL-MICRO]  75.59,79.2 0 bottom
FD13  FIDUCIALUFIDUCIAL  [FIDUCIAL-MICRO]  11.36,88.38 0 top
FD14  FIDUCIALUFIDUCIAL  [FIDUCIAL-MICRO]  11.36,88.38 0 bottom
FD15  FIDUCIALUFIDUCIAL  [FIDUCIAL-MICRO]  28.86,154.13 0 top
FD16  FIDUCIALUFIDUCIAL  [FIDUCIAL-MICRO]  28.86,154.13 0 bottom
FD17  FIDUCIALUFIDUCIAL  [FIDUCIAL-MICRO]  34.73,88.38 0 top
FD18  FIDUCIALUFIDUCIAL  [FIDUCIAL-MICRO]  34.73,88.38 0 bottom
FD19  FIDUCIALUFIDUCIAL  [FIDUCIAL-MICRO]  52.23,154.13 0 top
FD20  FIDUCIALUFIDUCIAL  [FIDUCIAL-MICRO]  52.23,154.13 0 bottom
FD21  FIDUCIALUFIDUCIAL  [FIDUCIAL-MICRO]  58.09,88.38 0 top
FD22  FIDUCIALUFIDUCIAL  [FIDUCIAL-MICRO]  58.09,88.38 0 bottom
FD23  FIDUCIALUFIDUCIAL  [FIDUCIAL-MICRO]  75.59,154.13 0 top
FD24  FIDUCIALUFIDUCIAL  [FIDUCIAL-MICRO]  75.59,154.13 0 bottom
FRAME1  FRAME-LEDGERNO_FOOTPRINT  [DUMMY]  54.5,14.59 0 top
FRAME2  FRAME-LEDGERNO_FOOTPRINT  [DUMMY]  31.13,14.59 0 top
FRAME3  FRAME-LEDGERNO_FOOTPRINT  [DUMMY]  77.87,14.59 0 top
FRAME4  FRAME-LEDGERNO_FOOTPRINT  [DUMMY]  31.13,89.52 0 top
FRAME5  FRAME-LEDGERNO_FOOTPRINT  [DUMMY]  54.5,89.52 0 top
FRAME6  FRAME-LEDGERNO_FOOTPRINT  [DUMMY]  77.87,89.52 0 top
H1  STAND-OFFTIGHT  [STAND-OFF-TIGHT]  27.18,15.24 0 top
H2  STAND-OFFTIGHT  [STAND-OFF-TIGHT]  9.4,15.24 0 top
H3  STAND-OFFTIGHT  [STAND-OFF-TIGHT]  9.4,68.58 0 top
H4  STAND-OFFTIGHT  [STAND-OFF-TIGHT]  27.18,68.58 0 top
H5  STAND-OFFTIGHT  [STAND-OFF-TIGHT]  32.77,15.24 0 top
H6  STAND-OFFTIGHT  [STAND-OFF-TIGHT]  50.55,15.24 0 top
H7  STAND-OFFTIGHT  [STAND-OFF-TIGHT]  32.77,68.58 0 top
H8  STAND-OFFTIGHT  [STAND-OFF-TIGHT]  50.55,68.58 0 top
H9  STAND-OFFTIGHT  [STAND-OFF-TIGHT]  56.13,15.24 0 top
H10  STAND-OFFTIGHT  [STAND-OFF-TIGHT]  73.91,15.24 0 top
H11  STAND-OFFTIGHT  [STAND-OFF-TIGHT]  56.13,68.58 0 top
H12  STAND-OFFTIGHT  [STAND-OFF-TIGHT]  73.91,68.58 0 top
H13  STAND-OFFTIGHT  [STAND-OFF-TIGHT]  9.4,90.17 0 top
H14  STAND-OFFTIGHT  [STAND-OFF-TIGHT]  27.18,90.17 0 top
H15  STAND-OFFTIGHT  [STAND-OFF-TIGHT]  9.4,143.51 0 top
H16  STAND-OFFTIGHT  [STAND-OFF-TIGHT]  27.18,143.51 0 top
H17  STAND-OFFTIGHT  [STAND-OFF-TIGHT]  32.77,90.17 0 top
H18  STAND-OFFTIGHT  [STAND-OFF-TIGHT]  50.55,90.17 0 top
H19  STAND-OFFTIGHT  [STAND-OFF-TIGHT]  32.77,143.51 0 top
H20  STAND-OFFTIGHT  [STAND-OFF-TIGHT]  50.55,143.51 0 top
H21  STAND-OFFTIGHT  [STAND-OFF-TIGHT]  56.13,90.17 0 top
H22  STAND-OFFTIGHT  [STAND-OFF-TIGHT]  73.91,90.17 0 top
H23  STAND-OFFTIGHT  [STAND-OFF-TIGHT]  56.13,143.51 0 top
H24  STAND-OFFTIGHT  [STAND-OFF-TIGHT]  73.91,143.51 0 top
I2C  JUMPER-SMT_3_2-NC_TRACE_SILK  [SMT-JUMPER_3_2-NC_TRACE_SILK]  8.36,21.1 270 bottom
I2C1  JUMPER-SMT_3_2-NC_TRACE_SILK  [SMT-JUMPER_3_2-NC_TRACE_SILK]  31.73,21.1 270 bottom
I2C2  JUMPER-SMT_3_2-NC_TRACE_SILK  [SMT-JUMPER_3_2-NC_TRACE_SILK]  55.09,21.1 270 bottom
I2C3  JUMPER-SMT_3_2-NC_TRACE_SILK  [SMT-JUMPER_3_2-NC_TRACE_SILK]  8.36,96.03 270 bottom
I2C4  JUMPER-SMT_3_2-NC_TRACE_SILK  [SMT-JUMPER_3_2-NC_TRACE_SILK]  31.73,96.03 270 bottom
I2C5  JUMPER-SMT_3_2-NC_TRACE_SILK  [SMT-JUMPER_3_2-NC_TRACE_SILK]  55.09,96.03 270 bottom
J1  USB Female Type C Connector  [USB-C-16P-6LAYER-ISOLATED]  18.29,18.9 0 top
J2  THING_PLUS_LOGICAL  [THING_PLUS]  6.86,12.7 0 top
J3  QWIIC_RA  [JST04_1MM_RA]  11.94,21.59 270 top
J4  CONN_03X2  [PAD_05_03X2_TP]  23.86,63 270 bottom
J5  [PAD_05_03X2_TP_NO4]  18.29,78.7 180 bottom
J6  [JST-2-SMD]  10.41,30.48 90 top
J7  MICRO-SDFRICTION  [MICROSD_TINY]  19,23.44 0 bottom
J8  THING_PLUS_LOGICAL  [THING_PLUS]  30.23,12.7 0 top
J9  USB Female Type C Connector  [USB-C-16P-6LAYER-ISOLATED]  41.66,18.9 0 top
J10  [JST-2-SMD]  33.78,30.48 90 top
J11  QWIIC_RA  [JST04_1MM_RA]  35.31,21.59 270 top
J12  MICRO-SDFRICTION  [MICROSD_TINY]  42.37,23.44 0 bottom
J13  CONN_03X2  [PAD_05_03X2_TP]  47.23,63 270 bottom
J14  [PAD_05_03X2_TP_NO4]  41.66,78.7 180 bottom
J15  THING_PLUS_LOGICAL  [THING_PLUS]  53.59,12.7 0 top
J16  USB Female Type C Connector  [USB-C-16P-6LAYER-ISOLATED]  65.02,18.9 0 top
J17  [JST-2-SMD]  57.15,30.48 90 top
J18  QWIIC_RA  [JST04_1MM_RA]  58.67,21.59 270 top
J19  MICRO-SDFRICTION  [MICROSD_TINY]  65.74,23.44 0 bottom
J20  CONN_03X2  [PAD_05_03X2_TP]  70.59,63 270 bottom
J21  [PAD_05_03X2_TP_NO4]  65.02,78.7 180 bottom
J22  THING_PLUS_LOGICAL  [THING_PLUS]  6.86,87.63 0 top
J23  USB Female Type C Connector  [USB-C-16P-6LAYER-ISOLATED]  18.29,93.83 0 top
J24  [JST-2-SMD]  10.41,105.41 90 top
J25  QWIIC_RA  [JST04_1MM_RA]  11.94,96.52 270 top
J26  MICRO-SDFRICTION  [MICROSD_TINY]  19,98.37 0 bottom
J27  CONN_03X2  [PAD_05_03X2_TP]  23.86,137.93 270 bottom
J28  [PAD_05_03X2_TP_NO4]  18.29,153.63 180 bottom
J29  THING_PLUS_LOGICAL  [THING_PLUS]  30.23,87.63 0 top
J30  USB Female Type C Connector  [USB-C-16P-6LAYER-ISOLATED]  41.66,93.83 0 top
J31  [JST-2-SMD]  33.78,105.41 90 top
J32  QWIIC_RA  [JST04_1MM_RA]  35.31,96.52 270 top
J33  MICRO-SDFRICTION  [MICROSD_TINY]  42.37,98.37 0 bottom
J34  CONN_03X2  [PAD_05_03X2_TP]  47.23,137.93 270 bottom
J35  [PAD_05_03X2_TP_NO4]  41.66,153.63 180 bottom
J36  THING_PLUS_LOGICAL  [THING_PLUS]  53.59,87.63 0 top
J37  USB Female Type C Connector  [USB-C-16P-6LAYER-ISOLATED]  65.02,93.83 0 top
J38  [JST-2-SMD]  57.15,105.41 90 top
J39  QWIIC_RA  [JST04_1MM_RA]  58.67,96.52 270 top
J40  MICRO-SDFRICTION  [MICROSD_TINY]  65.74,98.37 0 bottom
J41  CONN_03X2  [PAD_05_03X2_TP]  70.59,137.93 270 bottom
J42  [PAD_05_03X2_TP_NO4]  65.02,153.63 180 bottom
JP1  JUMPER-SMT_2_NC_TRACE_SILK  [SMT-JUMPER_2_NC_TRACE_SILK]  33.23,75.9 90 bottom
JP2  JUMPER-SMT_2_NC_TRACE_SILK  [SMT-JUMPER_2_NC_TRACE_SILK]  56.59,75.9 90 bottom
JP3  JUMPER-SMT_2_NC_TRACE_SILK  [SMT-JUMPER_2_NC_TRACE_SILK]  9.86,150.83 90 bottom
JP4  JUMPER-SMT_2_NC_TRACE_SILK  [SMT-JUMPER_2_NC_TRACE_SILK]  9.86,75.9 90 bottom
JP5  JUMPER-SMT_2_NC_TRACE_SILK  [SMT-JUMPER_2_NC_TRACE_SILK]  33.23,150.83 90 bottom
JP6  JUMPER-SMT_2_NC_TRACE_SILK  [SMT-JUMPER_2_NC_TRACE_SILK]  56.59,150.83 90 bottom
LOGO1  OSHW-LOGOMINI  [OSHW-LOGO-MINI]  20.46,23.58 0 top
LOGO2  SFE_LOGO_NAME_FLAME.1_INCH  [SFE_LOGO_NAME_FLAME_.1]  18.29,65.7 0 top
LOGO3  QWIIC_LOGO_4MM  [QWIIC_4MM]  13.4,21.52 90 top
LOGO4  SFE_LOGO_NAME_FLAMEBLANK  [BLANK]  30.12,13.58 0 top
LOGO5  SFE_LOGO_NAME_FLAME.1_INCH  [SFE_LOGO_NAME_FLAME_.1]  41.66,65.7 0 top
LOGO6  QWIIC_LOGO_4MM  [QWIIC_4MM]  36.77,21.52 90 top
LOGO7  OSHW-LOGOMINI  [OSHW-LOGO-MINI]  43.83,23.58 0 top
LOGO8  SFE_LOGO_NAME_FLAMEBLANK  [BLANK]  53.49,13.58 0 top
LOGO9  SFE_LOGO_NAME_FLAME.1_INCH  [SFE_LOGO_NAME_FLAME_.1]  65.02,65.7 0 top
LOGO10  QWIIC_LOGO_4MM  [QWIIC_4MM]  60.13,21.52 90 top
LOGO11  OSHW-LOGOMINI  [OSHW-LOGO-MINI]  67.19,23.58 0 top
LOGO12  SFE_LOGO_NAME_FLAMEBLANK  [BLANK]  76.85,13.58 0 top
LOGO13  SFE_LOGO_NAME_FLAME.1_INCH  [SFE_LOGO_NAME_FLAME_.1]  18.29,140.63 0 top
LOGO14  QWIIC_LOGO_4MM  [QWIIC_4MM]  13.4,96.45 90 top
LOGO15  OSHW-LOGOMINI  [OSHW-LOGO-MINI]  20.46,98.51 0 top
LOGO16  SFE_LOGO_NAME_FLAMEBLANK  [BLANK]  30.12,88.51 0 top
LOGO17  SFE_LOGO_NAME_FLAME.1_INCH  [SFE_LOGO_NAME_FLAME_.1]  41.66,140.63 0 top
LOGO18  QWIIC_LOGO_4MM  [QWIIC_4MM]  36.77,96.45 90 top
LOGO19  OSHW-LOGOMINI  [OSHW-LOGO-MINI]  43.83,98.51 0 top
LOGO20  SFE_LOGO_NAME_FLAMEBLANK  [BLANK]  53.49,88.51 0 top
LOGO21  SFE_LOGO_NAME_FLAME.1_INCH  [SFE_LOGO_NAME_FLAME_.1]  65.02,140.63 0 top
LOGO22  QWIIC_LOGO_4MM  [QWIIC_4MM]  60.13,96.45 90 top
LOGO23  OSHW-LOGOMINI  [OSHW-LOGO-MINI]  67.19,98.51 0 top
LOGO24  SFE_LOGO_NAME_FLAMEBLANK  [BLANK]  76.85,88.51 0 top
Q1  20V/4.2A/52mΩ/1.4W  [SOT23-3]  15.76,22.6 180 top
Q2  20V/4.2A/52mΩ/1.4W  [SOT23-3]  24.06,74.5 180 bottom
Q3  20V/4.2A/52mΩ/1.4W  [SOT23-3]  47.43,74.5 180 bottom
Q4  20V/4.2A/52mΩ/1.4W  [SOT23-3]  39.13,22.6 180 top
Q5  20V/4.2A/52mΩ/1.4W  [SOT23-3]  70.79,74.5 180 bottom
Q6  20V/4.2A/52mΩ/1.4W  [SOT23-3]  62.49,22.6 180 top
Q7  20V/4.2A/52mΩ/1.4W  [SOT23-3]  24.06,149.43 180 bottom
Q8  20V/4.2A/52mΩ/1.4W  [SOT23-3]  15.76,97.53 180 top
Q9  20V/4.2A/52mΩ/1.4W  [SOT23-3]  47.43,149.43 180 bottom
Q10  20V/4.2A/52mΩ/1.4W  [SOT23-3]  39.13,97.53 180 top
Q11  20V/4.2A/52mΩ/1.4W  [SOT23-3]  70.79,149.43 180 bottom
Q12  20V/4.2A/52mΩ/1.4W  [SOT23-3]  62.49,97.53 180 top
R1  1k  [0402-TIGHT]  10.86,23.4 180 bottom
R2  20k  [0402-TIGHT]  23.86,47.4 135 bottom
R3  5.1k  [0402-TIGHT]  24.06,17.7 270 top
R4  5.1k  [0402-TIGHT]  12.56,17.7 270 top
R5  2.2k  [0402-TIGHT]  8.16,73.1 270 bottom
R6  2.2k  [0402-TIGHT]  8.46,23.4 0 bottom
R7  2.2k  [0402-TIGHT]  8.46,18.8 0 bottom
R8  10k  [0402-TIGHT]  24.81,53.7 0 bottom
R9  4.7k  [0402-TIGHT]  10.86,24.4 180 bottom
R10  1M  [0402-TIGHT]  19.66,31.9 180 bottom
R11  4.7k  [0402-TIGHT]  8.38,27.89 270 bottom
R12  4.7k  [0402-TIGHT]  8.16,75.9 270 bottom
R13  1k  [0402-TIGHT]  21.76,75 90 bottom
R14  10k  [0402-TIGHT]  24.81,52.65 0 bottom
R15  1k  [0402-TIGHT]  16.71,25.3 270 top
R16  10k  [0402-TIGHT]  20.66,75 270 bottom
R17  4.7k  [0402-TIGHT]  34.23,24.4 180 bottom
R18  4.7k  [0402-TIGHT]  31.74,27.89 270 bottom
R19  5.1k  [0402-TIGHT]  47.43,17.7 270 top
R20  5.1k  [0402-TIGHT]  35.93,17.7 270 top
R21  2.2k  [0402-TIGHT]  31.83,18.8 0 bottom
R22  2.2k  [0402-TIGHT]  31.83,23.4 0 bottom
R23  1k  [0402-TIGHT]  34.23,23.4 180 bottom
R24  20k  [0402-TIGHT]  47.23,47.4 135 bottom
R25  1M  [0402-TIGHT]  43.03,31.9 180 bottom
R26  2.2k  [0402-TIGHT]  31.53,73.1 270 bottom
R27  4.7k  [0402-TIGHT]  31.53,75.9 270 bottom
R28  1k  [0402-TIGHT]  45.13,75 90 bottom
R29  1k  [0402-TIGHT]  40.08,25.3 270 top
R30  10k  [0402-TIGHT]  48.18,53.7 0 bottom
R31  10k  [0402-TIGHT]  48.18,52.65 0 bottom
R32  10k  [0402-TIGHT]  44.03,75 270 bottom
R33  4.7k  [0402-TIGHT]  57.59,24.4 180 bottom
R34  4.7k  [0402-TIGHT]  55.11,27.89 270 bottom
R35  5.1k  [0402-TIGHT]  70.79,17.7 270 top
R36  5.1k  [0402-TIGHT]  59.29,17.7 270 top
R37  2.2k  [0402-TIGHT]  55.19,18.8 0 bottom
R38  2.2k  [0402-TIGHT]  55.19,23.4 0 bottom
R39  1k  [0402-TIGHT]  57.59,23.4 180 bottom
R40  20k  [0402-TIGHT]  70.59,47.4 135 bottom
R41  1M  [0402-TIGHT]  66.39,31.9 180 bottom
R42  2.2k  [0402-TIGHT]  54.89,73.1 270 bottom
R43  4.7k  [0402-TIGHT]  54.89,75.9 270 bottom
R44  1k  [0402-TIGHT]  68.49,75 90 bottom
R45  1k  [0402-TIGHT]  63.44,25.3 270 top
R46  10k  [0402-TIGHT]  71.54,53.7 0 bottom
R47  10k  [0402-TIGHT]  71.54,52.65 0 bottom
R48  10k  [0402-TIGHT]  67.39,75 270 bottom
R49  4.7k  [0402-TIGHT]  10.86,99.33 180 bottom
R50  4.7k  [0402-TIGHT]  8.38,102.82 270 bottom
R51  5.1k  [0402-TIGHT]  24.06,92.63 270 top
R52  5.1k  [0402-TIGHT]  12.56,92.63 270 top
R53  2.2k  [0402-TIGHT]  8.46,93.73 0 bottom
R54  2.2k  [0402-TIGHT]  8.46,98.33 0 bottom
R55  1k  [0402-TIGHT]  10.86,98.33 180 bottom
R56  20k  [0402-TIGHT]  23.86,122.33 135 bottom
R57  1M  [0402-TIGHT]  19.66,106.83 180 bottom
R58  2.2k  [0402-TIGHT]  8.16,148.03 270 bottom
R59  4.7k  [0402-TIGHT]  8.16,150.83 270 bottom
R60  1k  [0402-TIGHT]  21.76,149.93 90 bottom
R61  1k  [0402-TIGHT]  16.71,100.23 270 top
R62  10k  [0402-TIGHT]  24.81,128.63 0 bottom
R63  10k  [0402-TIGHT]  24.81,127.58 0 bottom
R64  10k  [0402-TIGHT]  20.66,149.93 270 bottom
R65  4.7k  [0402-TIGHT]  34.23,99.33 180 bottom
R66  4.7k  [0402-TIGHT]  31.74,102.82 270 bottom
R67  5.1k  [0402-TIGHT]  47.43,92.63 270 top
R68  5.1k  [0402-TIGHT]  35.93,92.63 270 top
R69  2.2k  [0402-TIGHT]  31.83,93.73 0 bottom
R70  2.2k  [0402-TIGHT]  31.83,98.33 0 bottom
R71  1k  [0402-TIGHT]  34.23,98.33 180 bottom
R72  20k  [0402-TIGHT]  47.23,122.33 135 bottom
R73  1M  [0402-TIGHT]  43.03,106.83 180 bottom
R74  2.2k  [0402-TIGHT]  31.53,148.03 270 bottom
R75  4.7k  [0402-TIGHT]  31.53,150.83 270 bottom
R76  1k  [0402-TIGHT]  45.13,149.93 90 bottom
R77  1k  [0402-TIGHT]  40.08,100.23 270 top
R78  10k  [0402-TIGHT]  48.18,128.63 0 bottom
R79  10k  [0402-TIGHT]  48.18,127.58 0 bottom
R80  10k  [0402-TIGHT]  44.03,149.93 270 bottom
R81  4.7k  [0402-TIGHT]  57.59,99.33 180 bottom
R82  4.7k  [0402-TIGHT]  55.11,102.82 270 bottom
R83  5.1k  [0402-TIGHT]  70.79,92.63 270 top
R84  5.1k  [0402-TIGHT]  59.29,92.63 270 top
R85  2.2k  [0402-TIGHT]  55.19,93.73 0 bottom
R86  2.2k  [0402-TIGHT]  55.19,98.33 0 bottom
R87  1k  [0402-TIGHT]  57.59,98.33 180 bottom
R88  20k  [0402-TIGHT]  70.59,122.33 135 bottom
R89  1M  [0402-TIGHT]  66.39,106.83 180 bottom
R90  2.2k  [0402-TIGHT]  54.89,148.03 270 bottom
R91  4.7k  [0402-TIGHT]  54.89,150.83 270 bottom
R92  1k  [0402-TIGHT]  68.49,149.93 90 bottom
R93  1k  [0402-TIGHT]  63.44,100.23 270 top
R94  10k  [0402-TIGHT]  71.54,128.63 0 bottom
R95  10k  [0402-TIGHT]  71.54,127.58 0 bottom
R96  10k  [0402-TIGHT]  67.39,149.93 270 bottom
RN1  10K  [2506_AR]  15.06,56.7 315 bottom
RN2  10K  [2506_AR]  44.83,56.7 45 bottom
RN3  10K  [2506_AR]  21.46,49.7 135 bottom
RN4  10K  [2506_AR]  21.46,56.7 45 bottom
RN5  10K  [2506_AR]  15.06,49.7 45 bottom
RN6  10K  [2506_AR]  38.43,56.7 315 bottom
RN7  10K  [2506_AR]  38.43,49.7 45 bottom
RN8  10K  [2506_AR]  44.83,49.7 135 bottom
RN9  10K  [2506_AR]  68.19,56.7 45 bottom
RN10  10K  [2506_AR]  61.79,56.7 315 bottom
RN11  10K  [2506_AR]  61.79,49.7 45 bottom
RN12  10K  [2506_AR]  68.19,49.7 135 bottom
RN13  10K  [2506_AR]  21.46,131.63 45 bottom
RN14  10K  [2506_AR]  15.06,131.63 315 bottom
RN15  10K  [2506_AR]  15.06,124.63 45 bottom
RN16  10K  [2506_AR]  21.46,124.63 135 bottom
RN17  10K  [2506_AR]  44.83,131.63 45 bottom
RN18  10K  [2506_AR]  38.43,131.63 315 bottom
RN19  10K  [2506_AR]  38.43,124.63 45 bottom
RN20  10K  [2506_AR]  44.83,124.63 135 bottom
RN21  10K  [2506_AR]  68.19,131.63 45 bottom
RN22  10K  [2506_AR]  61.79,131.63 315 bottom
RN23  10K  [2506_AR]  61.79,124.63 45 bottom
RN24  10K  [2506_AR]  68.19,124.63 135 bottom
S1  USER  [TACTILE_SWITCH_SMD_4.6X2.8MM]  21.76,28.75 270 top
S2  RESET  [TACTILE_SWITCH_SMD_4.6X2.8MM]  24.64,22.86 0 top
S3  RESET  [TACTILE_SWITCH_SMD_4.6X2.8MM]  48.01,22.86 0 top
S4  USER  [TACTILE_SWITCH_SMD_4.6X2.8MM]  45.13,28.75 270 top
S5  RESET  [TACTILE_SWITCH_SMD_4.6X2.8MM]  71.37,22.86 0 top
S6  USER  [TACTILE_SWITCH_SMD_4.6X2.8MM]  68.49,28.75 270 top
S7  RESET  [TACTILE_SWITCH_SMD_4.6X2.8MM]  24.64,97.79 0 top
S8  USER  [TACTILE_SWITCH_SMD_4.6X2.8MM]  21.76,103.68 270 top
S9  RESET  [TACTILE_SWITCH_SMD_4.6X2.8MM]  48.01,97.79 0 top
S10  USER  [TACTILE_SWITCH_SMD_4.6X2.8MM]  45.13,103.68 270 top
S11  RESET  [TACTILE_SWITCH_SMD_4.6X2.8MM]  71.37,97.79 0 top
S12  USER  [TACTILE_SWITCH_SMD_4.6X2.8MM]  68.49,103.68 270 top
SHLD  JUMPER-SMT_2_NC_TRACE_SILK  [SMT-JUMPER_2_NC_TRACE_SILK]  28.22,19.04 270 bottom
SHLD1  JUMPER-SMT_2_NC_TRACE_SILK  [SMT-JUMPER_2_NC_TRACE_SILK]  51.59,19.04 270 bottom
SHLD2  JUMPER-SMT_2_NC_TRACE_SILK  [SMT-JUMPER_2_NC_TRACE_SILK]  74.96,19.04 270 bottom
SHLD3  JUMPER-SMT_2_NC_TRACE_SILK  [SMT-JUMPER_2_NC_TRACE_SILK]  28.22,93.97 270 bottom
SHLD4  JUMPER-SMT_2_NC_TRACE_SILK  [SMT-JUMPER_2_NC_TRACE_SILK]  51.59,93.97 270 bottom
SHLD5  JUMPER-SMT_2_NC_TRACE_SILK  [SMT-JUMPER_2_NC_TRACE_SILK]  74.96,93.97 270 bottom
SUPPLYTIE1  2PT_GND_TIESMALL  [2PT_GND_TIE_SMALL]  12.56,53.2 270 bottom
SUPPLYTIE2  2PT_GND_TIESMALL  [2PT_GND_TIE_SMALL]  17.42,41.57 90 top
SUPPLYTIE3  2PT_GND_TIESMALL  [2PT_GND_TIE_SMALL]  18.36,41.57 90 top
SUPPLYTIE4  2PT_GND_TIESMALL  [2PT_GND_TIE_SMALL]  41.73,41.57 90 top
SUPPLYTIE5  2PT_GND_TIESMALL  [2PT_GND_TIE_SMALL]  40.79,41.57 90 top
SUPPLYTIE6  2PT_GND_TIESMALL  [2PT_GND_TIE_SMALL]  35.93,53.2 270 bottom
SUPPLYTIE7  2PT_GND_TIESMALL  [2PT_GND_TIE_SMALL]  65.1,41.57 90 top
SUPPLYTIE8  2PT_GND_TIESMALL  [2PT_GND_TIE_SMALL]  64.16,41.57 90 top
SUPPLYTIE9  2PT_GND_TIESMALL  [2PT_GND_TIE_SMALL]  59.29,53.2 270 bottom
SUPPLYTIE10  2PT_GND_TIESMALL  [2PT_GND_TIE_SMALL]  18.36,116.5 90 top
SUPPLYTIE11  2PT_GND_TIESMALL  [2PT_GND_TIE_SMALL]  17.42,116.5 90 top
SUPPLYTIE12  2PT_GND_TIESMALL  [2PT_GND_TIE_SMALL]  12.56,128.13 270 bottom
SUPPLYTIE13  2PT_GND_TIESMALL  [2PT_GND_TIE_SMALL]  41.73,116.5 90 top
SUPPLYTIE14  2PT_GND_TIESMALL  [2PT_GND_TIE_SMALL]  40.79,116.5 90 top
SUPPLYTIE15  2PT_GND_TIESMALL  [2PT_GND_TIE_SMALL]  35.93,128.13 270 bottom
SUPPLYTIE16  2PT_GND_TIESMALL  [2PT_GND_TIE_SMALL]  65.1,116.5 90 top
SUPPLYTIE17  2PT_GND_TIESMALL  [2PT_GND_TIE_SMALL]  64.16,116.5 90 top
SUPPLYTIE18  2PT_GND_TIESMALL  [2PT_GND_TIE_SMALL]  59.29,128.13 270 bottom
TP1  TEST-POINT3X5  [PAD.03X.05]  11.94,80.01 0 bottom
TP2  TEST-POINT3X4  [PAD.03X.04]  10.67,58.42 90 bottom
TP3  TEST-POINT3X5  [PAD.03X.05]  27.18,72.39 0 bottom
TP4  TEST-POINT3  [PAD.03X.03]  9.4,53.34 0 bottom
TP5  TEST-POINT3X5  [PAD.03X.05]  27.18,77.47 0 bottom
TP6  TEST-POINT3X5  [PAD.03X.05]  13.21,73.66 0 bottom
TP7  TEST-POINT3X5  [PAD.03X.05]  27.18,74.93 0 bottom
TP8  TEST-POINT3X5  [PAD.03X.05]  27.18,80.01 0 bottom
TP9  TEST-POINT3  [PAD.03X.03]  25.91,54.61 0 bottom
TP10  TEST-POINT3X5  [PAD.03X.05]  24.64,80.01 0 bottom
TP11  TEST-POINT3X5  [PAD.03X.05]  35.31,80.01 0 bottom
TP12  TEST-POINT3X4  [PAD.03X.04]  34.04,58.42 90 bottom
TP13  TEST-POINT3X5  [PAD.03X.05]  50.55,72.39 0 bottom
TP14  TEST-POINT3  [PAD.03X.03]  32.77,53.34 0 bottom
TP15  TEST-POINT3X5  [PAD.03X.05]  50.55,77.47 0 bottom
TP16  TEST-POINT3X5  [PAD.03X.05]  36.58,73.66 0 bottom
TP17  TEST-POINT3X5  [PAD.03X.05]  50.55,74.93 0 bottom
TP18  TEST-POINT3X5  [PAD.03X.05]  50.55,80.01 0 bottom
TP19  TEST-POINT3  [PAD.03X.03]  49.28,54.61 0 bottom
TP20  TEST-POINT3X5  [PAD.03X.05]  48.01,80.01 0 bottom
TP21  TEST-POINT3X5  [PAD.03X.05]  58.67,80.01 0 bottom
TP22  TEST-POINT3X4  [PAD.03X.04]  57.4,58.42 90 bottom
TP23  TEST-POINT3X5  [PAD.03X.05]  73.91,72.39 0 bottom
TP24  TEST-POINT3  [PAD.03X.03]  56.13,53.34 0 bottom
TP25  TEST-POINT3X5  [PAD.03X.05]  73.91,77.47 0 bottom
TP26  TEST-POINT3X5  [PAD.03X.05]  59.94,73.66 0 bottom
TP27  TEST-POINT3X5  [PAD.03X.05]  73.91,74.93 0 bottom
TP28  TEST-POINT3X5  [PAD.03X.05]  73.91,80.01 0 bottom
TP29  TEST-POINT3  [PAD.03X.03]  72.64,54.61 0 bottom
TP30  TEST-POINT3X5  [PAD.03X.05]  71.37,80.01 0 bottom
TP31  TEST-POINT3X5  [PAD.03X.05]  11.94,154.94 0 bottom
TP32  TEST-POINT3X4  [PAD.03X.04]  10.67,133.35 90 bottom
TP33  TEST-POINT3X5  [PAD.03X.05]  27.18,147.32 0 bottom
TP34  TEST-POINT3  [PAD.03X.03]  9.4,128.27 0 bottom
TP35  TEST-POINT3X5  [PAD.03X.05]  27.18,152.4 0 bottom
TP36  TEST-POINT3X5  [PAD.03X.05]  13.21,148.59 0 bottom
TP37  TEST-POINT3X5  [PAD.03X.05]  27.18,149.86 0 bottom
TP38  TEST-POINT3X5  [PAD.03X.05]  27.18,154.94 0 bottom
TP39  TEST-POINT3  [PAD.03X.03]  25.91,129.54 0 bottom
TP40  TEST-POINT3X5  [PAD.03X.05]  24.64,154.94 0 bottom
TP41  TEST-POINT3X5  [PAD.03X.05]  35.31,154.94 0 bottom
TP42  TEST-POINT3X4  [PAD.03X.04]  34.04,133.35 90 bottom
TP43  TEST-POINT3X5  [PAD.03X.05]  50.55,147.32 0 bottom
TP44  TEST-POINT3  [PAD.03X.03]  32.77,128.27 0 bottom
TP45  TEST-POINT3X5  [PAD.03X.05]  50.55,152.4 0 bottom
TP46  TEST-POINT3X5  [PAD.03X.05]  36.58,148.59 0 bottom
TP47  TEST-POINT3X5  [PAD.03X.05]  50.55,149.86 0 bottom
TP48  TEST-POINT3X5  [PAD.03X.05]  50.55,154.94 0 bottom
TP49  TEST-POINT3  [PAD.03X.03]  49.28,129.54 0 bottom
TP50  TEST-POINT3X5  [PAD.03X.05]  48.01,154.94 0 bottom
TP51  TEST-POINT3X5  [PAD.03X.05]  58.67,154.94 0 bottom
TP52  TEST-POINT3X4  [PAD.03X.04]  57.4,133.35 90 bottom
TP53  TEST-POINT3X5  [PAD.03X.05]  73.91,147.32 0 bottom
TP54  TEST-POINT3  [PAD.03X.03]  56.13,128.27 0 bottom
TP55  TEST-POINT3X5  [PAD.03X.05]  73.91,152.4 0 bottom
TP56  TEST-POINT3X5  [PAD.03X.05]  59.94,148.59 0 bottom
TP57  TEST-POINT3X5  [PAD.03X.05]  73.91,149.86 0 bottom
TP58  TEST-POINT3X5  [PAD.03X.05]  73.91,154.94 0 bottom
TP59  TEST-POINT3  [PAD.03X.03]  72.64,129.54 0 bottom
TP60  TEST-POINT3X5  [PAD.03X.05]  71.37,154.94 0 bottom
U1  R7FA6M5  [P-LQFP100-14X14-0.50]  18.29,53.2 0 top
U2  DA14531MOD  [DA14531MOD]  18.29,78.38 0 top
U3  MCP73831  [SOT23-5]  10.36,28.11 180 bottom
U4  RT9080-33GJ5  [SOT23-5]  19.66,29.8 90 bottom
U5  MX25L12833F 128Mb  [WSON-8-6X5]  17.86,67.5 180 bottom
U6  RT9080-33GJ5  [SOT23-5]  11.66,62.7 0 bottom
U7  MAX17048  [DFN-8]  10.66,33.7 0 bottom
U8  LM66200  [SOT8]  13.46,28.9 270 bottom
U9  RT9080-33GJ5  [SOT23-5]  43.03,29.8 90 bottom
U10  MCP73831  [SOT23-5]  33.72,28.11 180 bottom
U11  MAX17048  [DFN-8]  34.03,33.7 0 bottom
U12  DA14531MOD  [DA14531MOD]  41.66,78.38 0 top
U13  MX25L12833F 128Mb  [WSON-8-6X5]  41.23,67.5 180 bottom
U14  R7FA6M5  [P-LQFP100-14X14-0.50]  41.66,53.2 0 top
U15  RT9080-33GJ5  [SOT23-5]  35.03,62.7 0 bottom
U16  LM66200  [SOT8]  36.83,28.9 270 bottom
U17  RT9080-33GJ5  [SOT23-5]  66.39,29.8 90 bottom
U18  MCP73831  [SOT23-5]  57.09,28.11 180 bottom
U19  MAX17048  [DFN-8]  57.39,33.7 0 bottom
U20  DA14531MOD  [DA14531MOD]  65.02,78.38 0 top
U21  MX25L12833F 128Mb  [WSON-8-6X5]  64.59,67.5 180 bottom
U22  R7FA6M5  [P-LQFP100-14X14-0.50]  65.02,53.2 0 top
U23  RT9080-33GJ5  [SOT23-5]  58.39,62.7 0 bottom
U24  LM66200  [SOT8]  60.19,28.9 270 bottom
U25  RT9080-33GJ5  [SOT23-5]  19.66,104.73 90 bottom
U26  MCP73831  [SOT23-5]  10.36,103.04 180 bottom
U27  MAX17048  [DFN-8]  10.66,108.63 0 bottom
U28  DA14531MOD  [DA14531MOD]  18.29,153.31 0 top
U29  MX25L12833F 128Mb  [WSON-8-6X5]  17.86,142.43 180 bottom
U30  R7FA6M5  [P-LQFP100-14X14-0.50]  18.29,128.13 0 top
U31  RT9080-33GJ5  [SOT23-5]  11.66,137.63 0 bottom
U32  LM66200  [SOT8]  13.46,103.83 270 bottom
U33  RT9080-33GJ5  [SOT23-5]  43.03,104.73 90 bottom
U34  MCP73831  [SOT23-5]  33.72,103.04 180 bottom
U35  MAX17048  [DFN-8]  34.03,108.63 0 bottom
U36  DA14531MOD  [DA14531MOD]  41.66,153.31 0 top
U37  MX25L12833F 128Mb  [WSON-8-6X5]  41.23,142.43 180 bottom
U38  R7FA6M5  [P-LQFP100-14X14-0.50]  41.66,128.13 0 top
U39  RT9080-33GJ5  [SOT23-5]  35.03,137.63 0 bottom
U40  LM66200  [SOT8]  36.83,103.83 270 bottom
U41  RT9080-33GJ5  [SOT23-5]  66.39,104.73 90 bottom
U42  MCP73831  [SOT23-5]  57.09,103.04 180 bottom
U43  MAX17048  [DFN-8]  57.39,108.63 0 bottom
U44  DA14531MOD  [DA14531MOD]  65.02,153.31 0 top
U45  MX25L12833F 128Mb  [WSON-8-6X5]  64.59,142.43 180 bottom
U46  R7FA6M5  [P-LQFP100-14X14-0.50]  65.02,128.13 0 top
U47  RT9080-33GJ5  [SOT23-5]  58.39,137.63 0 bottom
U48  LM66200  [SOT8]  60.19,103.83 270 bottom
U$1  [#I�C#0]  33.43,21.1 90 bottom
U$2  [#CHG#0]  31.73,31.3 90 bottom
U$3  [#I�C#0]  10.06,21.1 90 bottom
U$4  [#CHG#0]  8.36,31.3 90 bottom
U$5  [SFE_LOGO_FLAME_COPPER_EXPOSED_.1]  41.66,53.2 0 bottom
U$6  [#RST#0]  48.03,20.6 0 top
U$7  [CHG0]  41.33,27 90 top
U$8  [SFE_LOGO_FLAME_COPPER_EXPOSED_.1]  18.29,53.2 0 bottom
U$9  [SWD_RA6M50]  23.86,62.95 90 bottom
U$10  [SWD_BLE0]  18.26,78.7 0 bottom
U$11  [STAT0]  32.58,73.75 0 top
U$12  [300]  27.06,64.8 90 top
U$13  [#RST#0]  24.66,20.6 0 top
U$14  [CHG0]  17.96,27 90 top
U$15  [STAT0]  9.21,73.75 0 top
U$16  [PWR0]  9.11,76.4 0 top
U$17  [RGB0]  9.01,80 0 top
U$18  [THING_PLUS0]  18.29,37 0 top
U$19  [##RST#_#0]  28.41,26.65 0 top
U$20  [#3V3_#0]  28.41,29.2 0 top
U$21  [#VREF_#0]  28.41,31.75 0 top
U$22  [#GND_#0]  28.41,34.3 0 top
U$23  [#A0_#0]  28.41,36.8 0 top
U$24  [#A1_#0]  28.41,39.35 0 top
U$25  [#A2_#0]  28.41,41.9 0 top
U$26  [A30]  27.06,44.45 90 top
U$27  [A40]  27.06,47 90 top
U$28  [A50]  27.06,49.5 90 top
U$29  [SCK0]  27.01,51.65 90 top
U$30  [PICO0]  27.01,54.55 90 top
U$31  [POCI0]  27.01,57.6 90 top
U$32  [RX0]  27.06,60.15 90 top
U$33  [TX0]  27.06,62.3 90 top
U$34  [60]  9.51,60.4 90 top
U$35  [SDA0]  9.56,64.8 90 top
U$36  [SCL0]  9.56,62.3 90 top
U$37  [50]  9.56,56.75 90 top
U$38  [40]  9.56,54.65 90 top
U$39  [30]  9.61,52.35 90 top
U$40  [20]  9.61,49.55 90 top
U$41  [10]  9.51,47.6 90 top
U$42  [00]  9.81,44.45 90 top
U$43  [60]  9.66,59.9 90 bottom
U$44  [VU0]  10.06,41.85 0 top
U$45  [EN0]  10.11,39.35 0 top
U$46  [VBAT0]  10.91,36.85 0 top
U$47  [#PWR#0]  12.81,75.85 0 bottom
U$48  [50]  9.46,57.7 90 bottom
U$49  [#BAT#0]  16.76,34.45 0 bottom
U$50  [#SHLD#0]  28.21,22.4 90 bottom
U$51  [#RST#0]  26.81,26.7 90 bottom
U$52  [#_3V3#0]  26.06,29.15 0 bottom
U$53  [#_VR#0]  28.31,31.75 0 bottom
U$54  [#_GND#0]  25.91,34.25 0 bottom
U$55  [#_A0#0]  26.41,36.8 0 bottom
U$56  [#_A1#0]  26.56,39.4 0 bottom
U$57  [#_A2#0]  26.46,41.9 0 bottom
U$58  [#_A3#0]  26.46,44.45 0 bottom
U$59  [A40]  26.96,46.95 90 bottom
U$60  [A50]  26.96,49.55 90 bottom
U$61  [SCK0]  26.96,51.65 90 bottom
U$62  [PICO0]  26.96,54.55 90 bottom
U$63  [POCI0]  26.96,57.6 90 bottom
U$64  [RX0]  26.96,60.15 90 bottom
U$65  [TX0]  26.96,62.3 90 bottom
U$66  [40]  9.46,55 90 bottom
U$67  [SDA0]  9.56,64.8 90 bottom
U$68  [SCL0]  9.56,62.25 90 bottom
U$69  [30]  9.46,52.55 90 bottom
U$70  [20]  9.61,49.45 270 bottom
U$71  [#1#0]  9.56,47 0 bottom
U$72  [#0#0]  9.66,44.45 0 bottom
U$73  [#USRBTN#0]  19.36,28.85 90 top
U$74  [PWR0]  32.48,76.4 0 top
U$75  [RGB0]  32.38,80 0 top
U$76  [#VUSB#0]  11.11,41.9 0 bottom
U$77  [#EN_#0]  10.21,39.35 0 bottom
U$78  [#VBAT_#0]  11.26,36.8 0 bottom
U$79  [RA6M50]  18.29,35 0 top
U$80  [##RST#_#0]  51.78,26.65 0 top
U$81  [#0]  16.06,33.1 0 top
U$82  [RA6M50]  18.29,41.2 0 bottom
U$83  [THING0]  21.26,43.95 0 bottom
U$84  [PLUS0]  15.21,43.95 0 bottom
U$85  [_#0]  15.71,28.15 0 top
U$86  [300]  26.96,64.75 90 bottom
U$87  [#3V3_#0]  51.78,29.2 0 top
U$88  [#VREF_#0]  51.78,31.75 0 top
U$89  [#GND_#0]  51.78,34.3 0 top
U$90  [#A0_#0]  51.78,36.8 0 top
U$91  [#A1_#0]  51.78,39.35 0 top
U$92  [#A2_#0]  51.78,41.9 0 top
U$93  [A30]  50.43,44.45 90 top
U$94  [A40]  50.43,47 90 top
U$95  [A50]  50.43,49.5 90 top
U$96  [SCK0]  50.38,51.65 90 top
U$97  [PICO0]  50.38,54.55 90 top
U$98  [POCI0]  50.38,57.6 90 top
U$99  [RX0]  50.43,60.15 90 top
U$100  [TX0]  50.43,62.3 90 top
U$101  [SDA0]  32.93,64.8 90 top
U$102  [SCL0]  32.93,62.3 90 top
U$103  [VU0]  33.43,41.85 0 top
U$104  [EN0]  33.48,39.35 0 top
U$105  [VBAT0]  34.28,36.85 0 top
U$106  [#PWR#0]  36.18,75.85 0 bottom
U$107  [#BAT#0]  40.13,34.45 0 bottom
U$108  [#SHLD#0]  51.58,22.4 90 bottom
U$109  [#RST#0]  50.18,26.7 90 bottom
U$110  [#_3V3#0]  49.43,29.15 0 bottom
U$111  [#_GND#0]  49.28,34.25 0 bottom
U$112  [#_A0#0]  49.78,36.8 0 bottom
U$113  [#_A1#0]  49.93,39.4 0 bottom
U$114  [#_A2#0]  49.83,41.9 0 bottom
U$115  [#_A3#0]  49.83,44.45 0 bottom
U$116  [A40]  50.33,46.95 90 bottom
U$117  [A50]  50.33,49.55 90 bottom
U$118  [SCK0]  50.33,51.65 90 bottom
U$119  [PICO0]  50.33,54.55 90 bottom
U$120  [POCI0]  50.33,57.6 90 bottom
U$121  [RX0]  50.33,60.15 90 bottom
U$122  [TX0]  50.33,62.3 90 bottom
U$123  [SDA0]  32.93,64.8 90 bottom
U$124  [SCL0]  32.93,62.25 90 bottom
U$125  [#VUSB#0]  34.48,41.9 0 bottom
U$126  [#EN_#0]  33.58,39.35 0 bottom
U$127  [#VBAT_#0]  34.63,36.8 0 bottom
U$128  [THING_PLUS0]  41.66,37 0 top
U$129  [RA6M50]  41.66,35 0 top
U$130  [SWD_RA6M50]  47.23,62.95 90 bottom
U$131  [SWD_BLE0]  41.63,78.7 0 bottom
U$132  [RA6M50]  41.66,41.2 0 bottom
U$133  [THING0]  44.63,43.95 0 bottom
U$134  [PLUS0]  38.58,43.95 0 bottom
U$135  [#0]  39.43,33.1 0 top
U$136  [_#0]  39.08,28.15 0 top
U$137  [300]  50.43,64.8 90 top
U$138  [300]  50.33,64.75 90 bottom
U$139  [60]  32.88,60.4 90 top
U$140  [50]  32.93,56.75 90 top
U$141  [40]  32.93,54.65 90 top
U$142  [30]  32.98,52.35 90 top
U$143  [20]  32.98,49.55 90 top
U$144  [10]  32.88,47.6 90 top
U$145  [00]  33.18,44.45 90 top
U$146  [60]  33.03,59.9 90 bottom
U$147  [50]  32.83,57.7 90 bottom
U$148  [40]  32.83,55 90 bottom
U$149  [30]  32.83,52.55 90 bottom
U$150  [20]  32.98,49.45 270 bottom
U$151  [#1#0]  32.93,47 0 bottom
U$152  [#0#0]  33.03,44.45 0 bottom
U$153  [#USRBTN#0]  42.73,28.85 90 top
U$154  [#_VR#0]  51.68,31.75 0 bottom
U$155  [#I�C#0]  56.79,21.1 90 bottom
U$156  [#CHG#0]  55.09,31.3 90 bottom
U$157  [SFE_LOGO_FLAME_COPPER_EXPOSED_.1]  65.02,53.2 0 bottom
U$158  [#RST#0]  71.39,20.6 0 top
U$159  [CHG0]  64.69,27 90 top
U$160  [STAT0]  55.94,73.75 0 top
U$161  [PWR0]  55.84,76.4 0 top
U$162  [RGB0]  55.74,80 0 top
U$163  [##RST#_#0]  75.14,26.65 0 top
U$164  [#3V3_#0]  75.14,29.2 0 top
U$165  [#VREF_#0]  75.14,31.75 0 top
U$166  [#GND_#0]  75.14,34.3 0 top
U$167  [#A0_#0]  75.14,36.8 0 top
U$168  [#A1_#0]  75.14,39.35 0 top
U$169  [#A2_#0]  75.14,41.9 0 top
U$170  [A30]  73.79,44.45 90 top
U$171  [A40]  73.79,47 90 top
U$172  [A50]  73.79,49.5 90 top
U$173  [SCK0]  73.74,51.65 90 top
U$174  [PICO0]  73.74,54.55 90 top
U$175  [POCI0]  73.74,57.6 90 top
U$176  [RX0]  73.79,60.15 90 top
U$177  [TX0]  73.79,62.3 90 top
U$178  [SDA0]  56.29,64.8 90 top
U$179  [SCL0]  56.29,62.3 90 top
U$180  [VU0]  56.79,41.85 0 top
U$181  [EN0]  56.84,39.35 0 top
U$182  [VBAT0]  57.64,36.85 0 top
U$183  [#PWR#0]  59.54,75.85 0 bottom
U$184  [#BAT#0]  63.49,34.45 0 bottom
U$185  [#SHLD#0]  74.94,22.4 90 bottom
U$186  [#RST#0]  73.54,26.7 90 bottom
U$187  [#_3V3#0]  72.79,29.15 0 bottom
U$188  [#_GND#0]  72.64,34.25 0 bottom
U$189  [#_A0#0]  73.14,36.8 0 bottom
U$190  [#_A1#0]  73.29,39.4 0 bottom
U$191  [#_A2#0]  73.19,41.9 0 bottom
U$192  [#_A3#0]  73.19,44.45 0 bottom
U$193  [A40]  73.69,46.95 90 bottom
U$194  [A50]  73.69,49.55 90 bottom
U$195  [SCK0]  73.69,51.65 90 bottom
U$196  [PICO0]  73.69,54.55 90 bottom
U$197  [POCI0]  73.69,57.6 90 bottom
U$198  [RX0]  73.69,60.15 90 bottom
U$199  [TX0]  73.69,62.3 90 bottom
U$200  [SDA0]  56.29,64.8 90 bottom
U$201  [SCL0]  56.29,62.25 90 bottom
U$202  [#VUSB#0]  57.84,41.9 0 bottom
U$203  [#EN_#0]  56.94,39.35 0 bottom
U$204  [#VBAT_#0]  57.99,36.8 0 bottom
U$205  [THING_PLUS0]  65.02,37 0 top
U$206  [RA6M50]  65.02,35 0 top
U$207  [SWD_RA6M50]  70.59,62.95 90 bottom
U$208  [SWD_BLE0]  64.99,78.7 0 bottom
U$209  [RA6M50]  65.02,41.2 0 bottom
U$210  [THING0]  67.99,43.95 0 bottom
U$211  [PLUS0]  61.94,43.95 0 bottom
U$212  [#0]  62.79,33.1 0 top
U$213  [_#0]  62.44,28.15 0 top
U$214  [300]  73.79,64.8 90 top
U$215  [300]  73.69,64.75 90 bottom
U$216  [60]  56.24,60.4 90 top
U$217  [50]  56.29,56.75 90 top
U$218  [40]  56.29,54.65 90 top
U$219  [30]  56.34,52.35 90 top
U$220  [20]  56.34,49.55 90 top
U$221  [10]  56.24,47.6 90 top
U$222  [00]  56.54,44.45 90 top
U$223  [60]  56.39,59.9 90 bottom
U$224  [50]  56.19,57.7 90 bottom
U$225  [40]  56.19,55 90 bottom
U$226  [30]  56.19,52.55 90 bottom
U$227  [20]  56.34,49.45 270 bottom
U$228  [#1#0]  56.29,47 0 bottom
U$229  [#0#0]  56.39,44.45 0 bottom
U$230  [#USRBTN#0]  66.09,28.85 90 top
U$231  [#_VR#0]  75.04,31.75 0 bottom
U$232  [#I�C#0]  10.06,96.03 90 bottom
U$233  [#CHG#0]  8.36,106.23 90 bottom
U$234  [SFE_LOGO_FLAME_COPPER_EXPOSED_.1]  18.29,128.13 0 bottom
U$235  [#RST#0]  24.66,95.53 0 top
U$236  [CHG0]  17.96,101.93 90 top
U$237  [STAT0]  9.21,148.68 0 top
U$238  [PWR0]  9.11,151.33 0 top
U$239  [RGB0]  9.01,154.93 0 top
U$240  [##RST#_#0]  28.41,101.58 0 top
U$241  [#3V3_#0]  28.41,104.13 0 top
U$242  [#VREF_#0]  28.41,106.68 0 top
U$243  [#GND_#0]  28.41,109.23 0 top
U$244  [#A0_#0]  28.41,111.73 0 top
U$245  [#A1_#0]  28.41,114.28 0 top
U$246  [#A2_#0]  28.41,116.83 0 top
U$247  [A30]  27.06,119.38 90 top
U$248  [A40]  27.06,121.93 90 top
U$249  [A50]  27.06,124.43 90 top
U$250  [SCK0]  27.01,126.58 90 top
U$251  [PICO0]  27.01,129.48 90 top
U$252  [POCI0]  27.01,132.53 90 top
U$253  [RX0]  27.06,135.08 90 top
U$254  [TX0]  27.06,137.23 90 top
U$255  [SDA0]  9.56,139.73 90 top
U$256  [SCL0]  9.56,137.23 90 top
U$257  [VU0]  10.06,116.78 0 top
U$258  [EN0]  10.11,114.28 0 top
U$259  [VBAT0]  10.91,111.78 0 top
U$260  [#PWR#0]  12.81,150.78 0 bottom
U$261  [#BAT#0]  16.76,109.38 0 bottom